# Altium PCB MCU_Board_fNIRS.PcbDoc
Units mm, origin at the board's own origin, x right, y up, seen from the top; angles counter-clockwise.
Board outline 42 x 42 mm, 4 copper layers (SIG_TOP, GND_TOP, GND_BOT, SIG_BOT), stack 1.658 mm thick; 53 components, 60 nets, 275 pads, 63 vias.
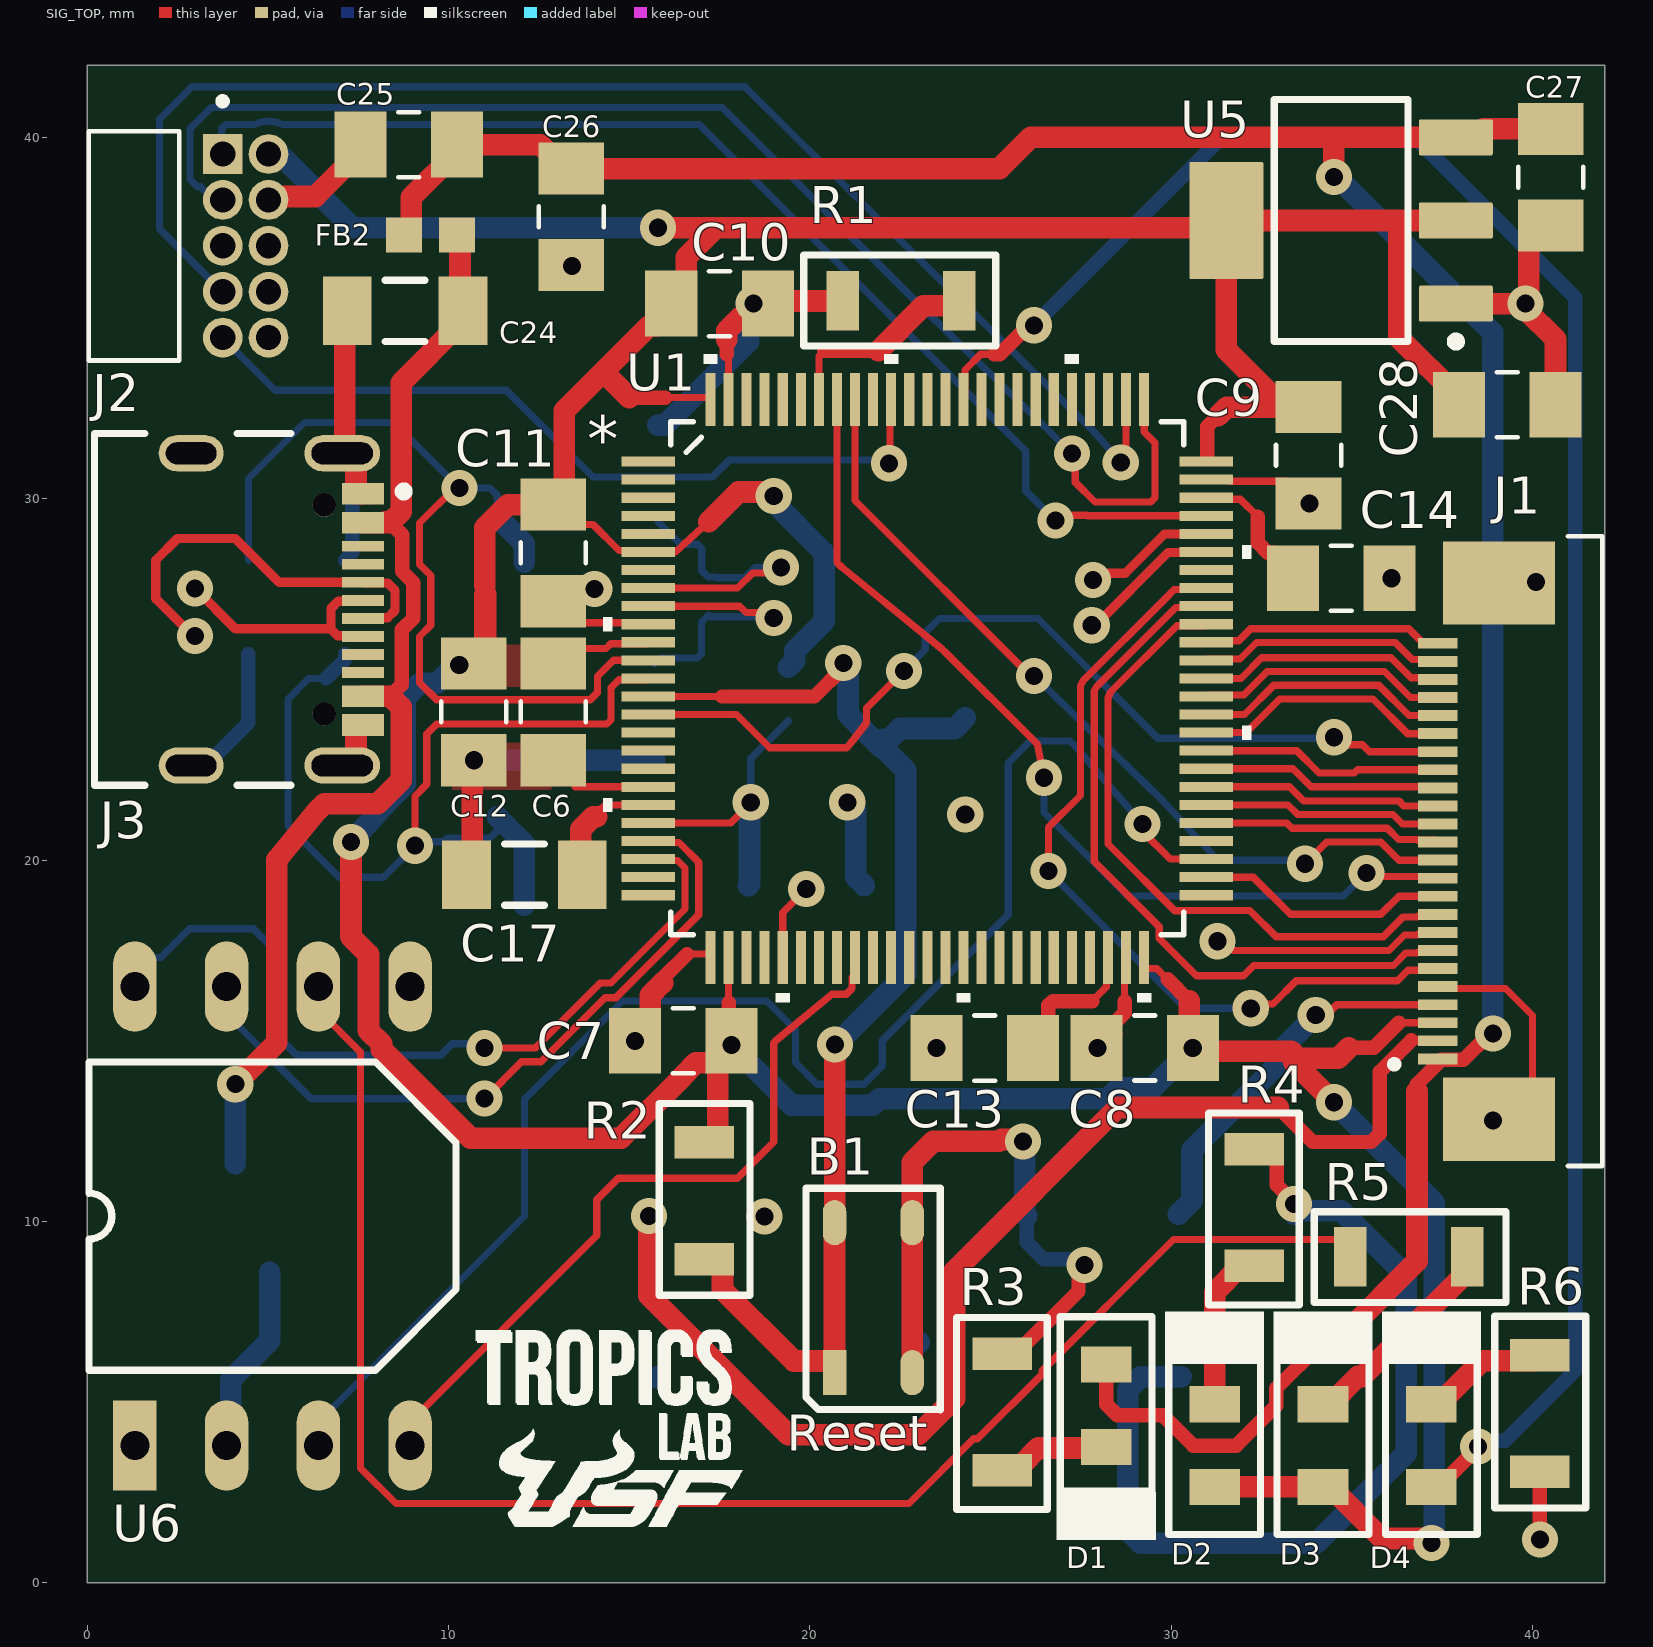
[diagram p0: SIG_TOP view]
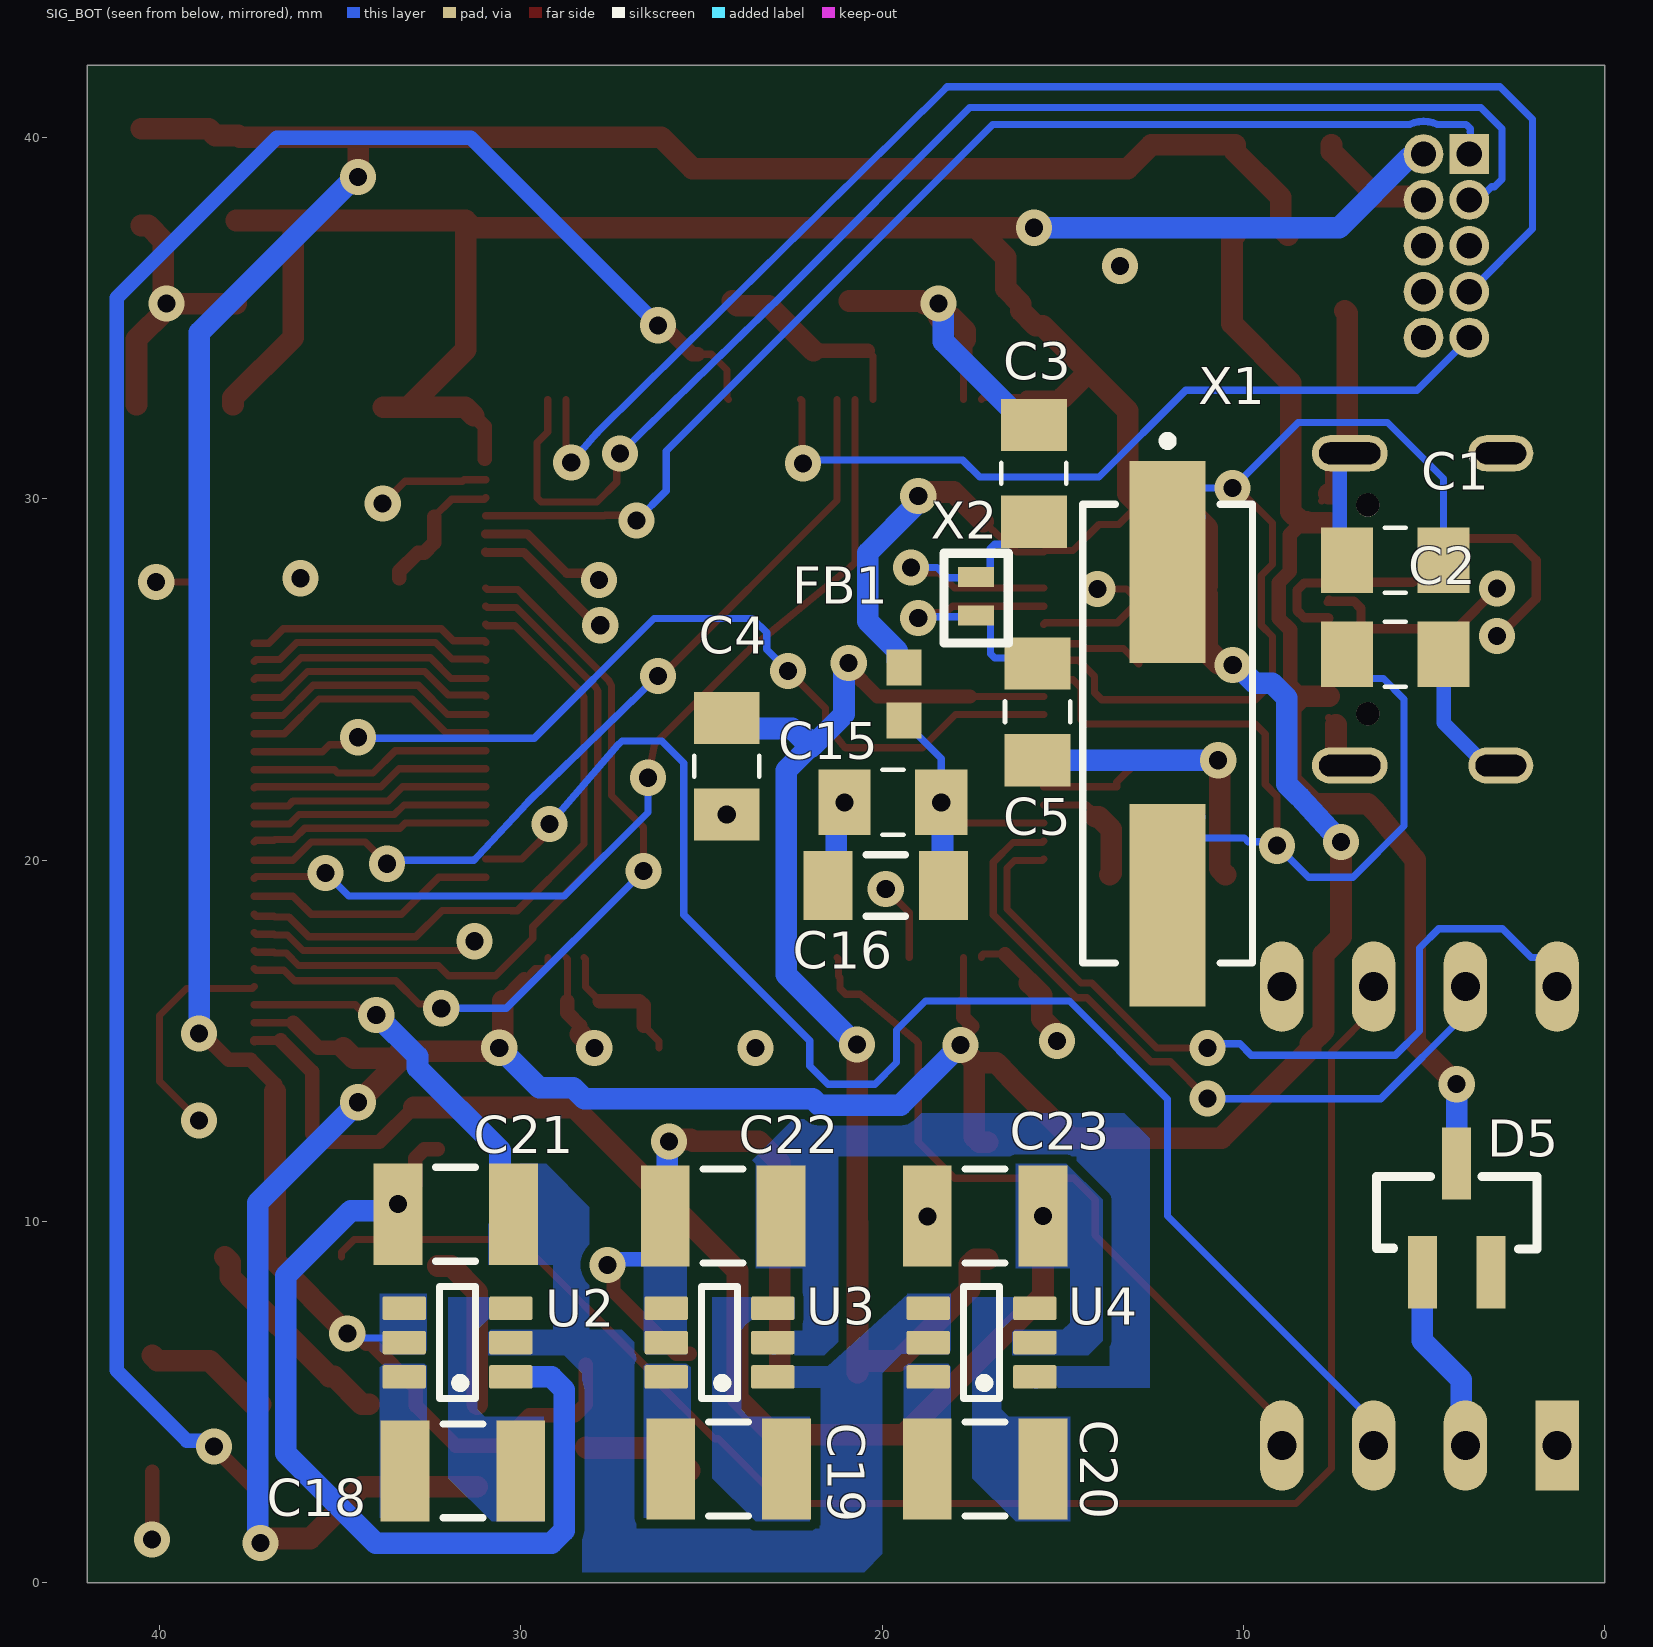
[diagram p1: SIG_BOT view, seen from below]
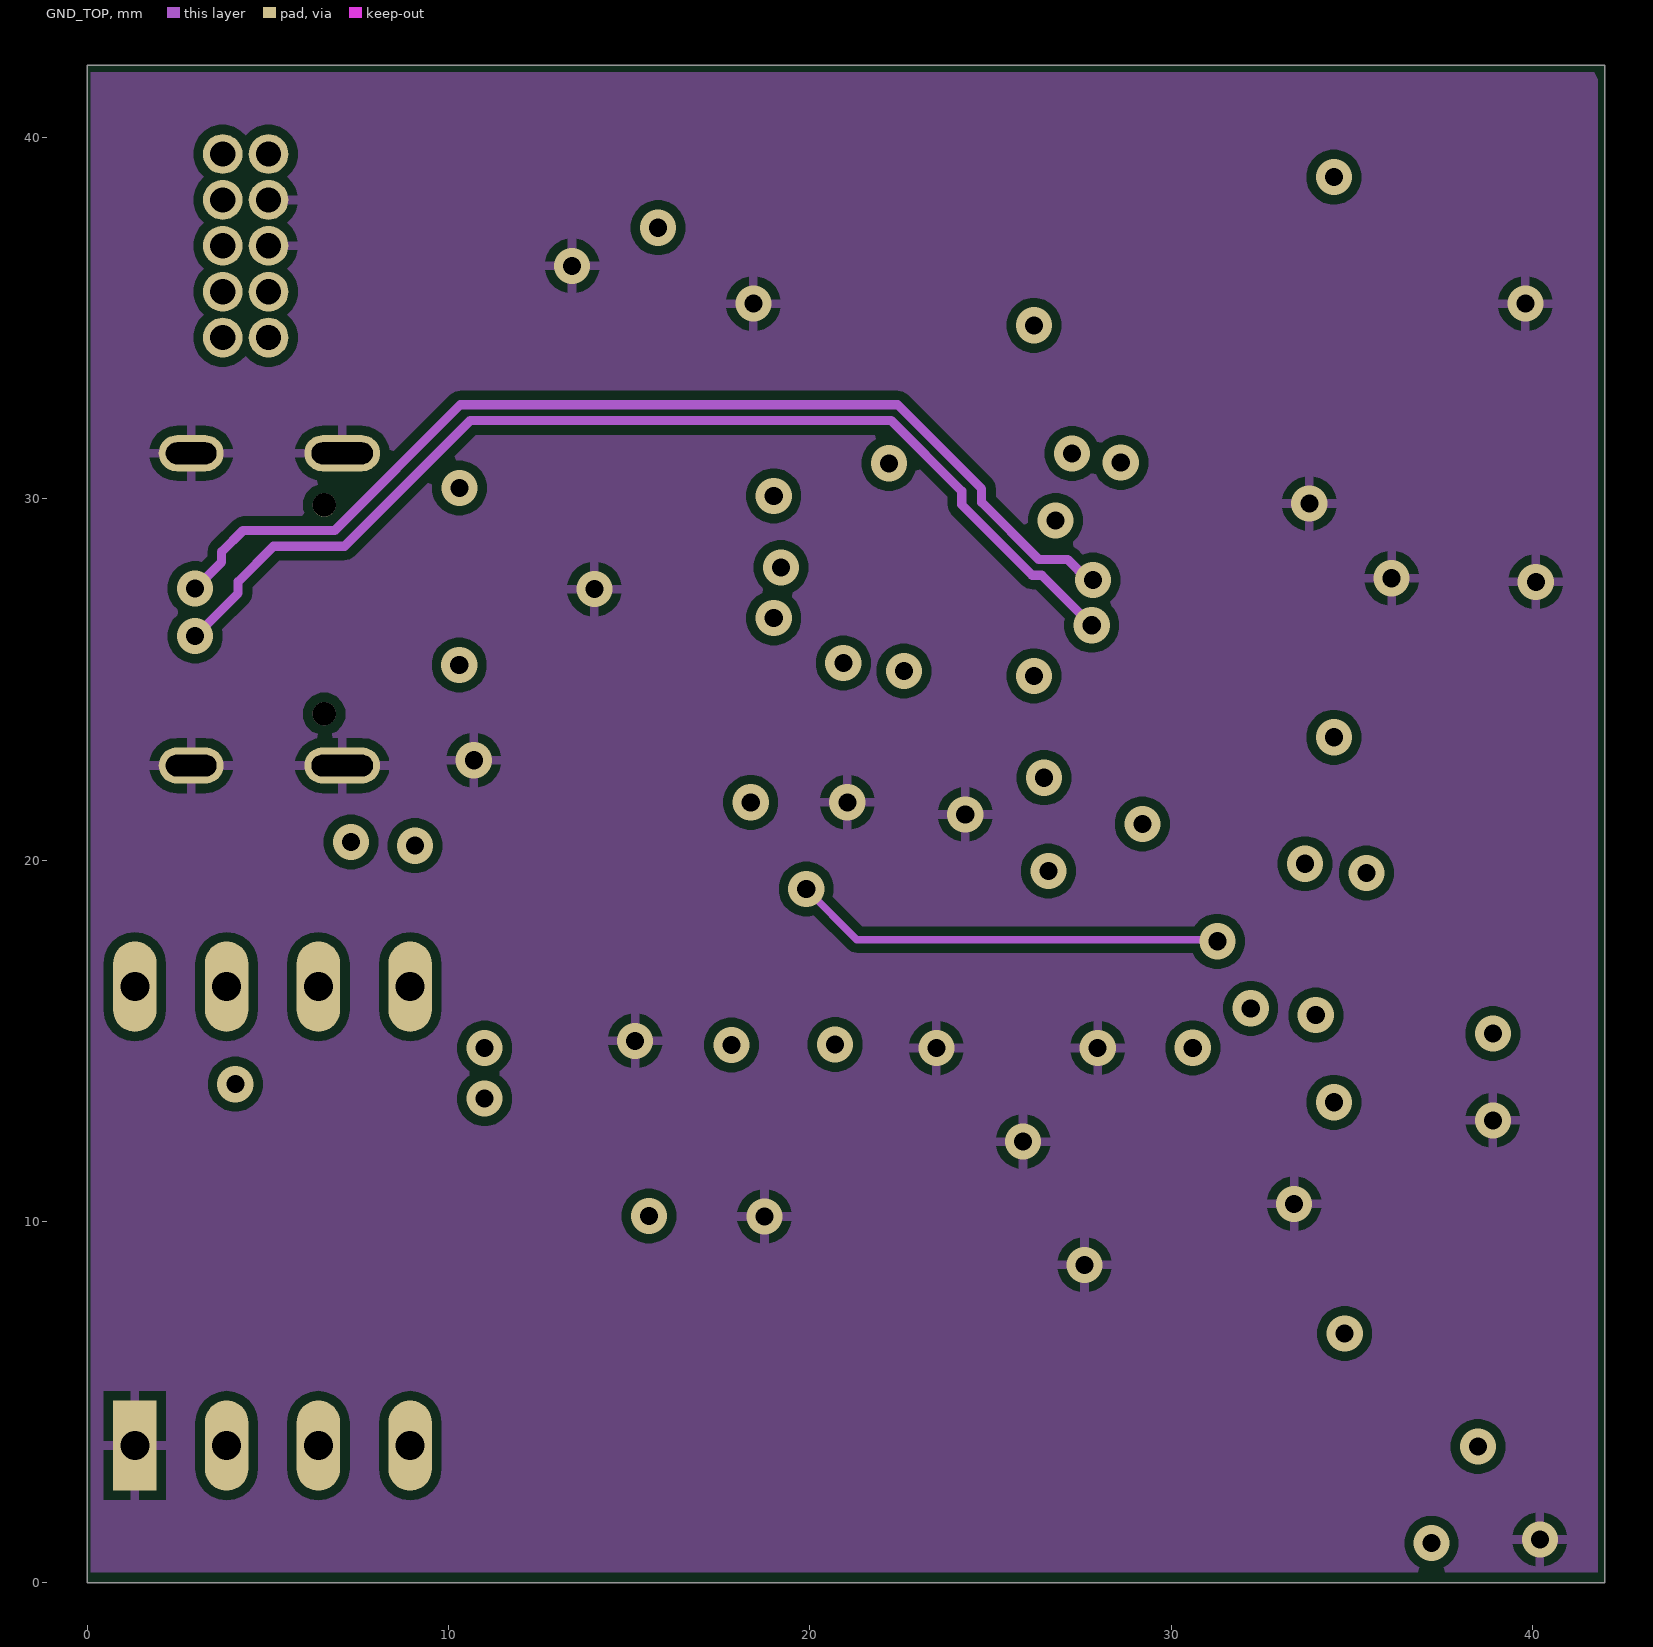
[diagram p2: GND_TOP]
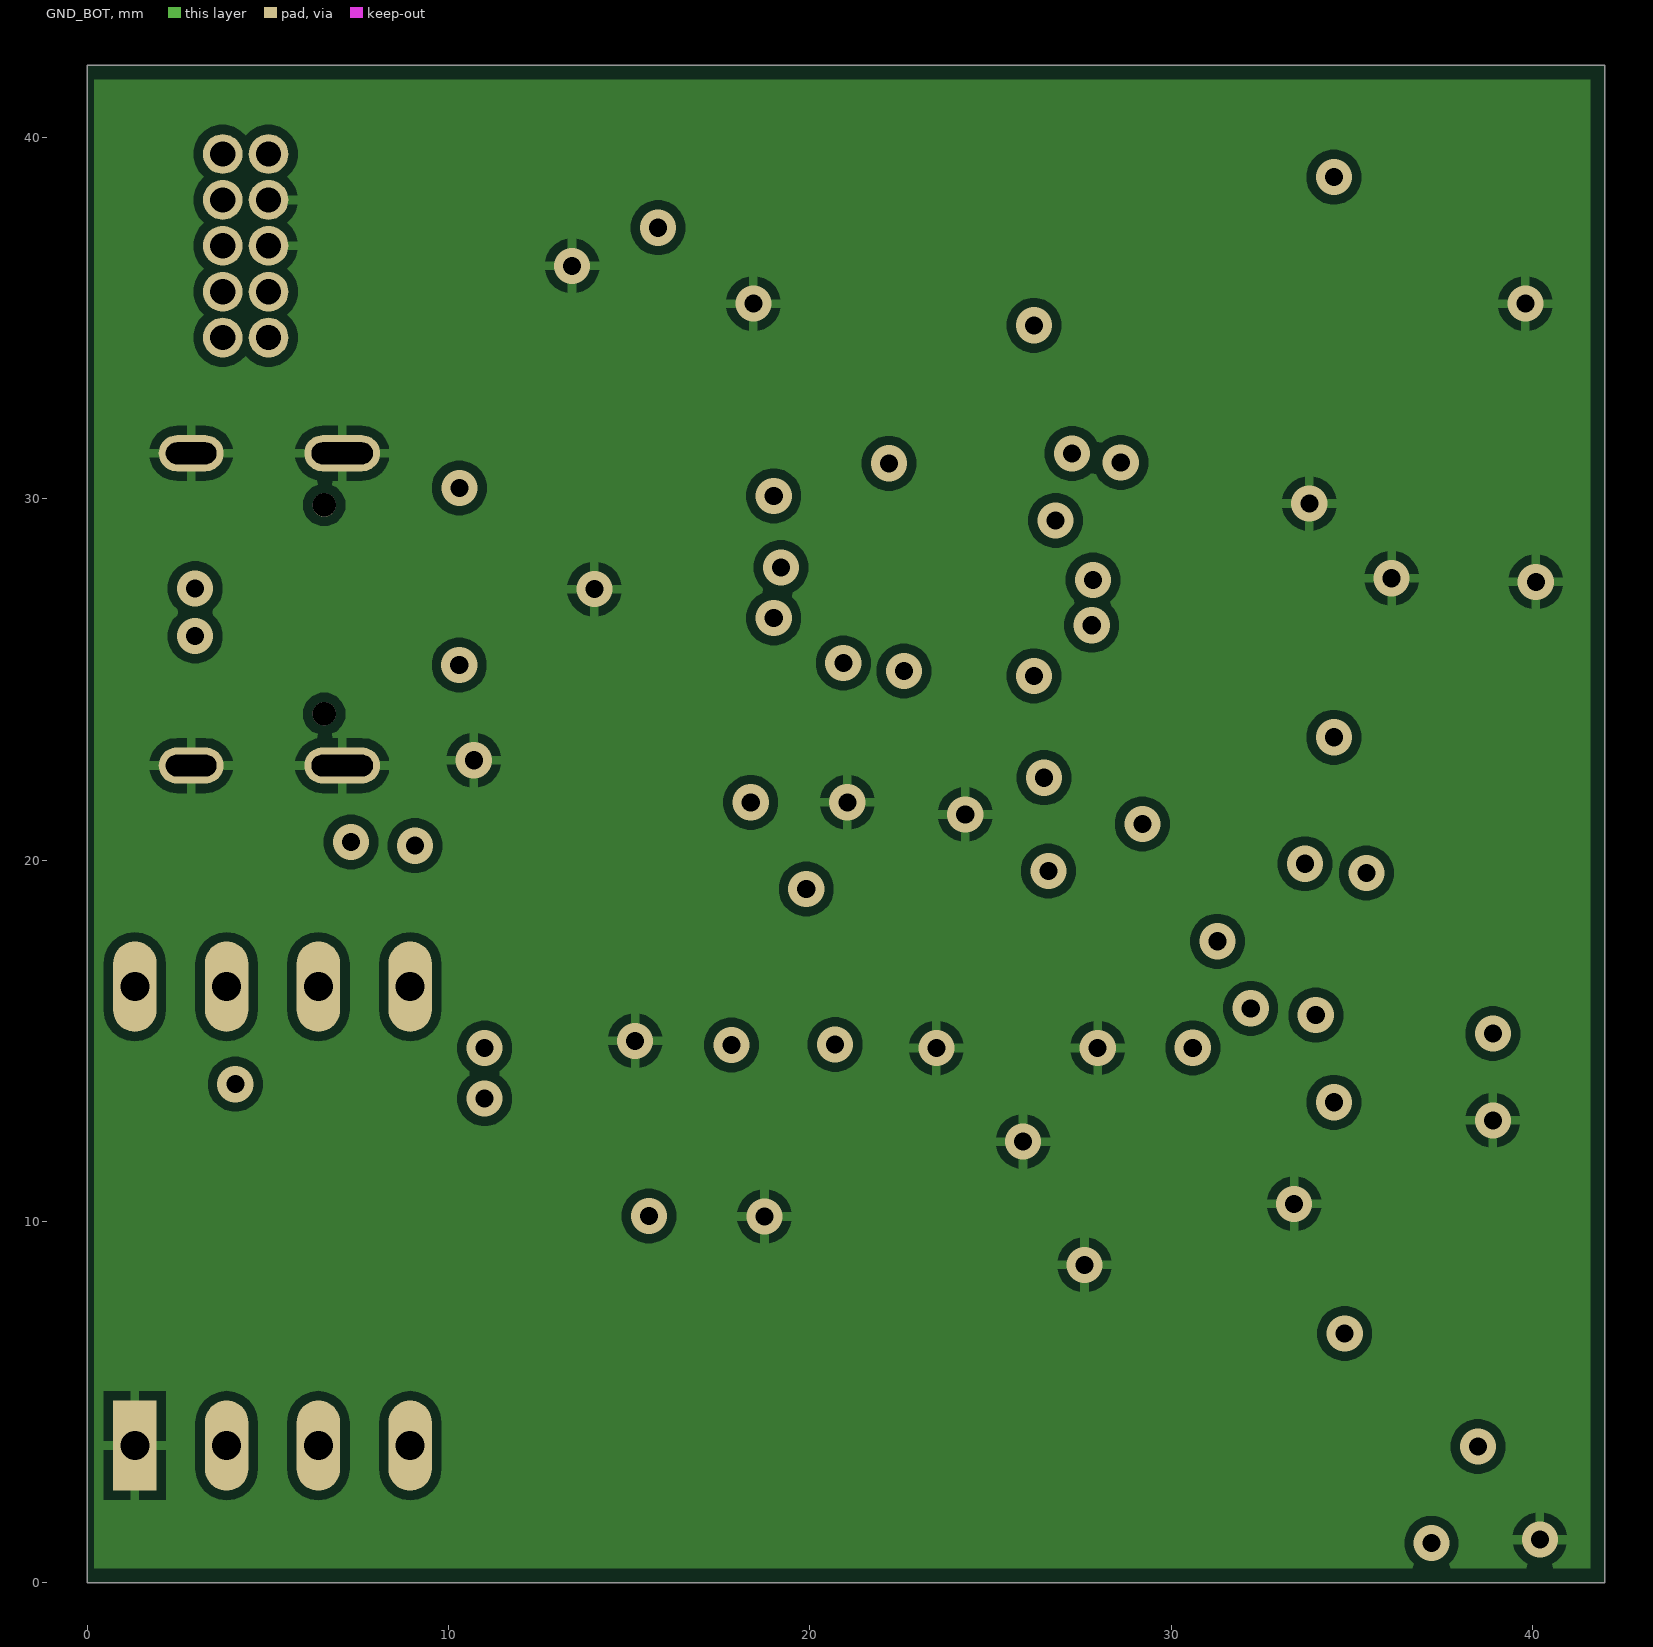
[diagram p3: GND_BOT]
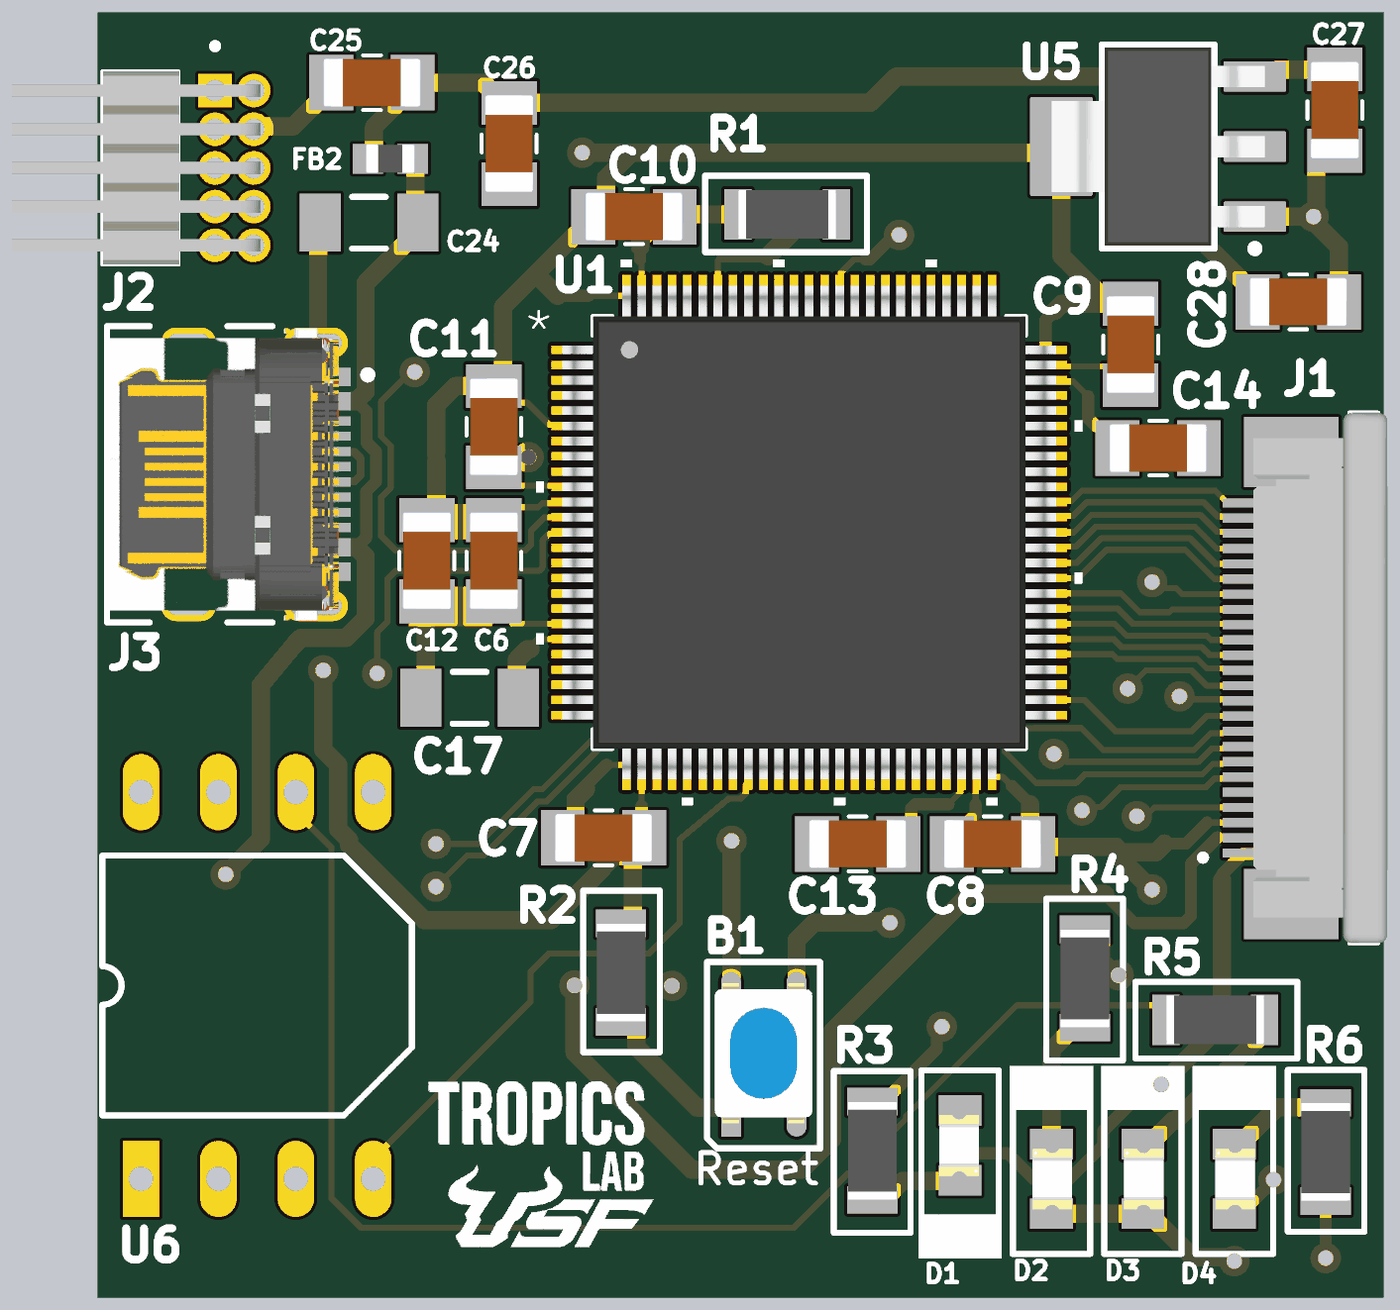
[diagram p4: 3D render of the assembled board from above, using the file's embedded part models]
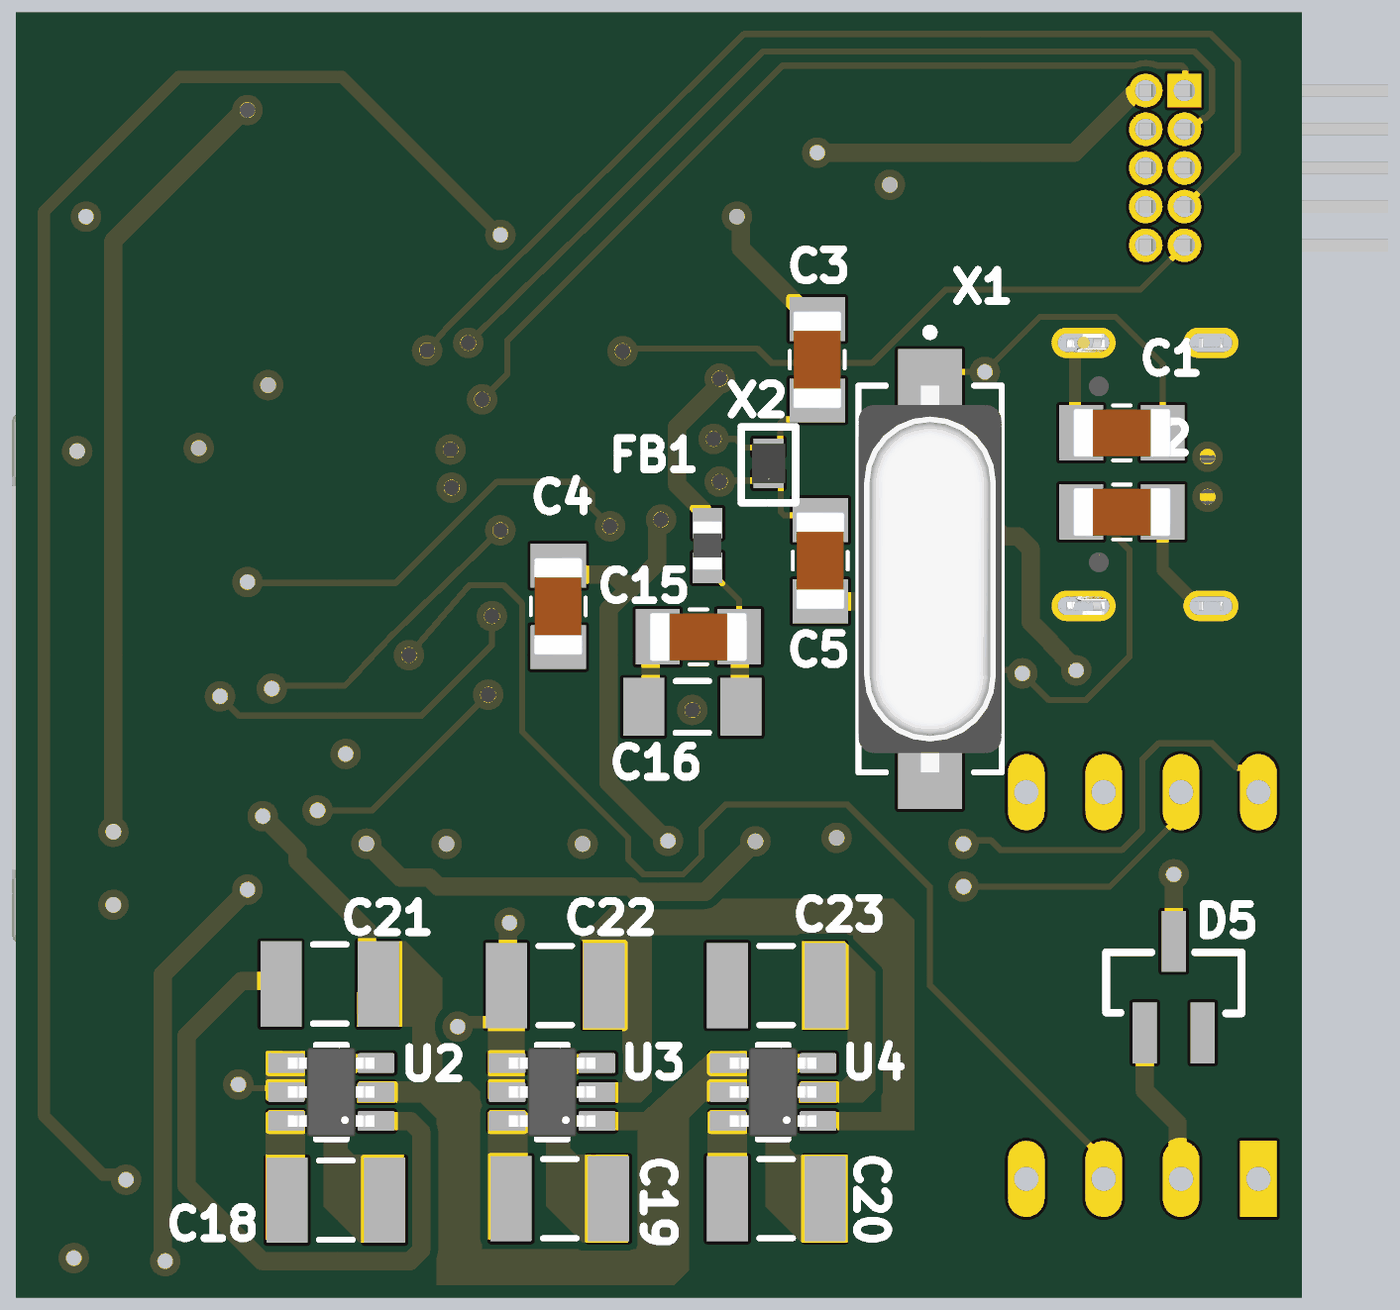
[diagram p5: 3D render of the assembled board from below, using the file's embedded part models]

## Layer stack, top to bottom
Top Solder: solder mask 0.0102, Solder Resist, Dk 3.5
SIG_TOP: signal copper 0.035
Dielectric 2: prepreg 0.2104, PP-006, Dk 4.1
GND_TOP: signal copper 0.051
Dielectric 1: dielectric 1.065, FR-4, Dk 4.8
GND_BOT: signal copper 0.051
Dielectric 3: prepreg 0.2104, PP-006, Dk 4.1
SIG_BOT: signal copper 0.035
Bottom Solder: solder mask 0.0102, Solder Resist, Dk 3.5

## Board outline
0,0 0,42 42,42 42,0

## Design rules (kind name [scope] priority, off if disabled: settings)
Clearance [All] p1: gap=0.254 ignorepadtopadclearanceinfootprint=TRUE except(0: Arc-Hole Track-Hole SMDPad-Hole THPad-Hole Via-Hole Fill-Hole Poly-Hole Region-Hole Text-Hole; 0.18: Arc-Arc Arc-Track Arc-SMDPad Track-Track Track-SMDPad)
DiffPairsRouting [InDifferentialPair('USB_OTG_D')] p1 off: maxlimit=0.254 minlimit=0.127 mostfreqgap=0.254 toplayer_maxgap=0.127 toplayer_prefgap=0.127 toplayer_minwidth=0.261 toplayer_maxwidth=0.261 toplayer_prefwidth=0.261 midlayer1_mingap=0.254 midlayer1_minwidth=0.381 midlayer1_maxwidth=0.381 midlayer1_prefwidth=0.381 midlayer2_mingap=0.254 midlayer2_minwidth=0.381 midlayer2_maxwidth=0.381 midlayer2_prefwidth=0.381 bottomlayer_maxgap=0.127 bottomlayer_prefgap=0.127 bottomlayer_minwidth=0.261 bottomlayer_maxwidth=0.261 bottomlayer_prefwidth=0.261 maxuncoupledlength=12.7
PolygonConnect [All] p1: thpad.connectstyle=Relief thpad.reliefconductorwidth=0.254 thpad.reliefentries=4 thpad.polygonreliefangle="90 Angle" thpad.airgapwidth=0.254 smdpad.connectstyle=Direct smdpad.reliefconductorwidth=0.254 smdpad.reliefentries=4 smdpad.polygonreliefangle="90 Angle" smdpad.airgapwidth=0.254 via.connectstyle=Relief via.reliefconductorwidth=0.254 via.reliefentries=4 via.polygonreliefangle="90 Angle" via.airgapwidth=0.254
RoutingVias RoutingVias_1 [All] p1: holewidth=0.5 width=1 viastyle="Through Hole" minholewidth=0.5 minwidth=1 maxholewidth=0.5 maxwidth=1
SilkToSilkClearance [All] p1 off: silktosilkclearance=0.254
SilkToSolderMaskClearance [IsPad] p1 off: minsilkscreentomaskgap=0.254 clearancetoexposedcopper=TRUE
SolderMaskExpansion [All] p1: expansion=0.102 istentingtop=FALSE
Width [All] p1: maxlimit=0.6 minlimit=0.2 preferedwidth=0.4 minimp=50.000000 maximp=50.000000 favimp=50.000000
27 further rules are at their usual default settings.

## Classes and differential pairs
component class MCU_Board_fNIRS: B1 C1 C2 C3 C4 C5 C6 C7 C8 C9 C10 C11 C12 C13 C14 C15 C16 C17 D5 FB1 J1 J2 R1 R2 U1 U6 X1 X2
component class MCU_Board_fNIRS_POWER: C18 C19 C20 C21 C22 C23 C24 C25 C26 C27 C28 D1 D2 D3 D4 FB2 J3 R3 R4 R5 R6 U2 U3 U4 U5
differential pair USB_OTG_D: +USB_OTG_D_P -USB_OTG_D_N

## Components (designator, comment, footprint, x,y, rotation, side; value= is the part's Value field where it differs from the comment)
B1 "Push Button" PTS810 21.7,7.9 r90 top
C1 "27pF" CAPC3216X180N 5.8,28.3 r180 bottom value=1uF
C2 "27pF" CAPC3216X180N 5.8,25.7 r0 bottom value=1uF
C3 "18pF" CAPC3216X180N 15.8,30.7 r90 bottom value=1uF
C4 "0.1uF" CAPC3216X180N 24.3,22.6 r90 bottom value="0.10 μF"
C5 "18pF" CAPC3216X180N 15.7,24.1 r270 bottom value=1uF
C6 "0.1uF" CAPC3216X180N 12.9,24.1 r90 top value="0.10 μF"
C7 "0.1uF" CAPC3216X180N 16.5,15 r0 top value="0.10 μF"
C8 "0.1uF" CAPC3216X180N 29.265,14.801 r0 top value="0.10 μF"
C9 "0.1uF" CAPC3216X180N 33.8,31.2 r90 top value="0.10 μF"
C10 "0.1uF" CAPC3216X180N 17.5,35.4 r180 top value="0.10 μF"
C11 "0.1uF" CAPC3216X180N 12.9,28.5 r90 top value="0.10 μF"
C12 "47uF" CAPC3216X180N 10.7,24.1 r90 top value=1uF
C13 "0.1uF" CAPC3216X180N 24.836,14.8 r0 top value="0.10 μF"
C14 "0.1uF" CAPC3216X180N 34.7,27.8 r180 top value="0.10 μF"
C15 "0.1uF" CAPC3216X180N 19.7,21.6 r180 bottom value="0.10 μF"
C16 "1uF" CAPC1206(3216)130_M 19.9,19.3 r180 bottom
C17 "1uF" CAPC1206(3216)130_M 12.1,19.6 r0 top
C18 "3.3uF" CAPC1210(3225)190_M 31.6,3.1 r180 bottom
C19 "3.3uF" CAPC1210(3225)190_M 24.25,3.15 r180 bottom
C20 "3.3uF" CAPC1210(3225)190_M 17.15,3.15 r180 bottom
C21 "3.3uF" CAPC1210(3225)190_M 31.8,10.2 r0 bottom
C22 "3.3uF" CAPC1210(3225)190_M 24.4,10.15 r0 bottom
C23 "3.3uF" CAPC1210(3225)190_M 17.15,10.15 r0 bottom
C24 "10nF" CAPC1206(3216)130_M 8.8,35.2 r180 top value=1uF
C25 "0.1uF" CAPC3216X180N 8.9,39.8 r180 top value="0.10 μF"
C26 "10uF" CAPC3216X180N 13.4,37.8 r270 top
C27 "1uF" CAPC3216X180N 40.5,38.9 r90 top
C28 "1uF" CAPC3216X180N 39.3,32.6 r180 top
D1 "BLUE LED" XZCFBB54W-1VF 28.2,4.9 r90 top
D2 "BLUE LED" XZCFBB54W-1VF 31.2,3.8 r270 top
D3 "GREEN LED" XZCFBB54W-1VF 34.2,3.8 r270 top
D4 "GREEN LED" XZCFBB54W-1VF 37.2,3.8 r270 top
D5 "BAT54LT1G" BAT54LT1 4.1,10.1 r180 bottom (schematic designator D?)
FB1 "600 Ohms @ 100 MHz" BEADC1608X95N 19.4,24.6 r270 bottom value=1uF
FB2 "BLM18PG221SN1D" BEADC1608X95N 9.5,37.3 r180 top value=1uF
J1 "FPC Connector" TE_FPC 37.372,20.25 r90 top
J2 "20021112-00010T4LF" AMPHENOL_20021112-00010T4LF 1.3,37 r270 top
J3 "USB4105-GF-A" FP-USB4105-GF-A-MFG 4.045,26.938 r270 top
R1 "10k" R1206 22.5,35.5 r180 top
R2 "10k" R1206 17.1,10.6 r90 top
R3 "300" R1206 25.3,4.7 r270 top
R4 "300" R1206 32.275,10.36 r270 top
R5 "300" R1206 36.6,9 r0 top
R6 "300" R1206 40.225,4.71 r90 top
U1 "STM32H723VGT6" LQFP100_STM 23.25,25.028 r0 top
U2 "LM2664" LM2664 31.75,6.65 r0 bottom
U3 "LM2664" LM2664 24.5,6.65 r0 bottom
U4 "LM2664" LM2664 17.25,6.65 r0 bottom
U5 "TLV1117LV33DCYR" DCY0004A_M 34.7,37.7 r180 top
U6 "FTDI UART" UB232R 1.32,3.8 r90 top
X1 "ABLS-8.000MHZ-B4-T" ABRA-ABLS-14.7456MHZ-B2-T_V 12.1,23.5 r270 bottom
X2 "ECS-.327-6-1210-TR" ECS-.327-6-1210-TR 17.4,27.3 r90 bottom

## Footprints (in the part's own frame and the unit in brackets; to place one, negate y for a bottom-side part, rotate by r counter-clockwise, add the part's x,y. Pads: shape width x height; smd on the part's side, far side on the other; paste and mask are expansions set on the pad)
ABRA-ABLS-14.7456MHZ-B2-T_V [mm] "SMD, 2-Leads, Body 11.4x4.7mm"
  rect 5.6x2.1 smd: 1(-4.75,0) 2(4.75,0)
  silkscreen extent -8.22,-2.35 6.35,2.35, body extent -6.35,-2.35 6.35,2.35, height 4.16
AMPHENOL_20021112-00010T4LF [mm]
  rect 1.1x1.1 / inner round 1.1 / far side rect 1.1x1.1 hole 0.7: 1(-2.54,2.45)
  round 1.1 hole 0.7: 2(-2.54,3.72) 3(-1.27,2.45) 4(-1.27,3.72) 5(0,2.45) 6(0,3.72) 7(1.27,2.45) 8(1.27,3.72) 9(2.54,2.45) 10(2.54,3.72)
  silkscreen extent -4.1,-1.25 3.18,2.55, body extent -3.18,-4.23 3.18,3.94, height 3.43
BAT54LT1 [mm]
  rect 0.8x2 smd: 1(-0.95,-1.503) 2(0.95,-1.503) 3(-0.001,1.503)
  silkscreen extent -2.22,-0.86 2.23,1.14
BEADC1608X95N [mm]
  rect 1x0.97 smd: 1(-0.735,0) 2(0.735,0)
  body extent -0.8,-0.48 0.8,0.47, height 0.8
CAPC1206(3216)130_M [mm] "Chip Capacitor, Body 3.2x1.6mm, Height 1.3mm, IPC Low Density"
  rect 1.35x1.9 smd: 1(-1.6,0) 2(1.6,0)
  silkscreen extent -0.55,-0.85 0.55,0.85, body extent -1.7,-0.9 1.7,0.9, height 1.3
CAPC1210(3225)190_M [mm] "Chip Capacitor, Body 3.2x2.5mm, Height 1.9mm, IPC Low Density"
  rect 1.35x2.8 smd: 1(-1.6,0) 2(1.6,0)
  silkscreen extent -0.55,-1.3 0.55,1.3, body extent -1.7,-1.35 1.7,1.35, height 1.9
CAPC3216X180N [mm]
  rect 1.44x1.82 smd: 1(-1.336,0) 2(1.336,0)
  silkscreen extent -0.29,-0.9 0.29,0.9, body extent -1.6,-0.8 1.6,0.8, height 1.8
DCY0004A_M [mm] "SOT223, 4-Leads, Body 6.7x3.7mm, Pitch 2.3mm, IPC Low Density"
  rrect10% 2.05x1 smd: 1(-3.175,2.3) 2(-3.175,0) 3(-3.175,-2.3)
  rrect5% 2.05x3.25 smd: 4(3.175,0)
  silkscreen extent -3.3,-3.35 1.85,3.47, body extent -3.5,-3.25 3.5,3.25, height 1.62
ECS-.327-6-1210-TR [mm]
  rect 0.55x1 smd: 1(-0.533,0) 2(0.533,0)
  silkscreen extent -1.3,-0.89 1.19,0.89, body extent -0.65,-0.55 0.65,0.55, height 0.51
FP-USB4105-GF-A-MFG [mm]
  rrect100% 1x2.1 hole 1.7 slot 0.6 at 0 deg paste-1000 mask+0: 1(-4.32,3.015) 2(4.32,3.015)
  rrect100% 1x1.8 hole 1.4 slot 0.6 at 0 deg paste-1000 mask+0: 3(-4.32,-1.165) 4(4.32,-1.165)
  rect 0.6x1.15 smd paste+0 mask+0: A1-B12(-3.2,3.59) A4-B9(-2.4,3.59) B1-A12(3.2,3.59) B4-A9(2.4,3.59)
  rect 0.3x1.15 smd paste+0 mask+0: A5(-1.25,3.59) A6(-0.25,3.59) A7(0.25,3.59) A8(1.25,3.59) B5(1.75,3.59) B6(0.75,3.59) B7(-0.75,3.59) B8(-1.75,3.59)
  round 0.65 hole 0.65 unplated paste-1000 mask+0: ""(-2.89,2.515) ""(2.89,2.515)
  silkscreen extent -4.86,-3.84 4.86,4.84, body extent -4.96,-3.94 4.96,4.27, height 0.25
LM2664 [mm] "SOT23, 6-Leads, Body 3.05x1.75mm, Pitch 0.95mm, IPC Low Density"
  rrect15% 1.2x0.65 smd: 1(-1.475,0.95) 2(-1.475,0) 3(-1.475,-0.95) 4(1.475,-0.95) 5(1.475,0) 6(1.475,0.95)
  silkscreen extent -0.5,-1.55 0.5,1.55, body extent -1.42,-1.46 1.42,1.46, height 1.11
LQFP100_STM [mil]
  rect 58x11 smd paste-29 mask+5: 1(-304,236.22) 2(-304,216.54) 3(-304,196.85) 4(-304,177.17) 5(-304,157.48) 6(-304,137.8) 7(-304,118.11) 8(-304,98.43) 9(-304,78.74) 10(-304,59.06) 11(-304,39.37) 12(-304,19.69) 13(-304,0) 14(-304,-19.68) 15(-304,-39.37) 16(-304,-59.06) 17(-304,-78.74) 18(-304,-98.43) 19(-304,-118.11) 20(-304,-137.8) 21(-304,-157.48) 22(-304,-177.17) 23(-304,-196.85) 24(-304,-216.54) 25(-304,-236.22) 51(304,-236.22) 52(304,-216.54) 53(304,-196.85) 54(304,-177.17) 55(304,-157.48) 56(304,-137.8) 57(304,-118.11) 58(304,-98.43) 59(304,-78.74) 60(304,-59.06) 61(304,-39.37) 62(304,-19.68) 63(304,0) 64(304,19.68) 65(304,39.37) 66(304,59.06) 67(304,78.74) 68(304,98.43) 69(304,118.11) 70(304,137.8) 71(304,157.48) 72(304,177.17) 73(304,196.85) 74(304,216.54) 75(304,236.22)
  rect 11x58 smd paste-29 mask+5: 26(-236.22,-304) 27(-216.54,-304) 28(-196.85,-304) 29(-177.17,-304) 30(-157.48,-304) 31(-137.8,-304) 32(-118.11,-304) 33(-98.43,-304) 34(-78.74,-304) 35(-59.06,-304) 36(-39.37,-304) 37(-19.69,-304) 38(0,-304) 39(19.68,-304) 40(39.37,-304) 41(59.06,-304) 42(78.74,-304) 43(98.43,-304) 44(118.11,-304) 45(137.8,-304) 46(157.48,-304) 47(177.17,-304) 48(196.85,-304) 49(216.54,-304) 50(236.22,-304) 76(236.22,304) 77(216.54,304) 78(196.85,304) 79(177.17,304) 80(157.48,304) 81(137.8,304) 82(118.11,304) 83(98.43,304) 84(78.74,304) 85(59.06,304) 86(39.37,304) 87(19.68,304) 88(0,304) 89(-19.69,304) 90(-39.37,304) 91(-59.06,304) 92(-78.74,304) 93(-98.43,304) 94(-118.11,304) 95(-137.8,304) 96(-157.48,304) 97(-177.17,304) 98(-196.85,304) 99(-216.54,304) 100(-236.22,304)
  silkscreen extent -353,-353 353,353, body extent -319,-319 319,319, height 63
PTS810 [mm]
  rect 1.25x0.65 smd: 1(-2.083,1.016)
  oval 1.25x0.65 smd: 2(2.067,1.016) 3(-2.083,-1.134) 4(2.067,-1.134)
  silkscreen extent -3.11,-1.91 3.02,1.8, body extent -2.27,-1.65 2.33,1.55, height 2.7
R1206 [mm]
  rect 0.9x1.65 smd: 1(-1.64,0.025) 2(1.59,0.025)
  silkscreen extent -2.64,-1.24 2.67,1.27, body extent -1.63,-0.77 1.57,0.83, height 0.6
TE_FPC [mm]
  rect 0.3x1.1 smd: 1(-5.75,0) 2(-5.25,0) 3(-4.75,0) 4(-4.25,0) 5(-3.75,0) 6(-3.25,0) 7(-2.75,0) 8(-2.25,0) 9(-1.75,0) 10(-1.25,0) 11(-0.75,0) 12(-0.25,0) 13(0.25,0) 14(0.75,0) 15(1.25,0) 16(1.75,0) 17(2.25,0) 18(2.75,0) 19(3.25,0) 20(3.75,0) 21(4.25,0) 22(4.75,0) 23(5.25,0) 24(5.75,0)
  rect 2.3x3.1 smd: S1(-7.42,-1.7) S2(7.42,-1.7)
  silkscreen extent -8.71,-4.55 8.71,1.3, body extent -8.71,-4.86 8.71,0.25
UB232R [mm]
  rect 2.5x1.2 hole 0.8: 1(0,0)
  oval 2.5x1.2 hole 0.8: 2(0,-2.54) 3(0,-5.08) 4(0,-7.62) 5(12.7,-7.62) 6(12.7,-5.08) 7(12.7,-2.54) 8(12.7,0)
  silkscreen extent 2.08,-8.89 10.62,1.27
XZCFBB54W-1VF [mm]
  rect 1x1.4 smd: 1(-1.143,0) 2(1.143,0)
  silkscreen extent -3.71,-1.37 2.47,1.37, body extent -1,-0.62 1,0.68, height 0.9

## Part data
B1: library part "PTS810 SJG 250 SMTR LFS", "Tactile Switch SPST-NO Top Actuated Surface Mount"
C1 C2: library part C1206C270K5GAC7800, "CAP CER 27PF 50V C0G/NP0 1206", Case-EIA=1206, Case-Metric=3216, Rated Voltage="25 V", Tolerance="-20% to +80%", Max Thickness="1.3 mm", Technology=SMT
C3 C5: library part C1206C180J5GAC7800, "18 pF ±5% 50V Ceramic Capacitor C0G, NP0 1206 (3216 Metric)", Case-EIA=1206, Case-Metric=3216, Rated Voltage="25 V", Tolerance="-20% to +80%", Max Thickness="1.3 mm", Technology=SMT
C4 C6 C7 C8 C9 C10 C11 C13 C14 C15 C25: library part C1206C104K5RAC7210, "1206", Capacitance="0.10 μF", Manufacturer=KEMET, Package=C1206C-EB, Temperature="-55°C to +150°C", Temperature Characteristic=X7R, Temperature Coefficient=15%, Temperature Range High=+150°C, Temperature Range Low=-55°C, Tolerance=0.1, Voltage Rating="50 V", Automotive=Yes, Automotive Grade="Grade 0", Category=Cap, ComponentLink2Description=Datasheet, ComponentLink2URL=https://content.kemet.com/datasheets/KEM_C1007_X8R_ULTRA_150C_SMD.pdf, Device Class L1="Passive Components", Device Class L2=Capacitors, Device Class L3="Ceramic Capacitors", Digikey Description="CAP CER 0.1UF 50V X7R 1206", Height=0.88mm, Ipc Land Pattern Name=CAPC320160X78, Lead Free=Yes, Manufacturer Part Number=C1206C104K5RAC7210, Material=Ceramic, Mouser Description="Multilayer Ceramic Capacitors MLCC - SMD/SMT 50volts 0.1uF X7R 10%", Octopart=https://octopart.com/c1206c104k5rac7210-kemet-3919856, RoHS=TRUE
C12: library part CL31A476MQHNNWE, "47 µF ±20% 6.3V Ceramic Capacitor X5R 1206 (3216 Metric)", Case-EIA=1206, Case-Metric=3216, Rated Voltage="25 V", Tolerance="-20% to +80%", Max Thickness="1.3 mm", Technology=SMT
C16: library part 12063G105ZAT4A_1, "CAP 1uF 25V -20% to +80% 1206 (3216 Metric) Thickness 1.3mm SMD / C1206C105Z3VAC7800", Case-EIA=1206, Case-Metric=3216, Rated Voltage="25 V", Tolerance="-20% to +80%", Max Thickness="1.3 mm", Technology=SMT
C17: library part 12063G105ZAT4A_1, "CAP 1uF 25V -20% to +80% 1206 (3216 Metric) Thickness 1.3mm SMD", Case-EIA=1206, Case-Metric=3216, Rated Voltage="25 V", Tolerance="-20% to +80%", Max Thickness="1.3 mm", Technology=SMT
C18 C19 C20 C21 C22 C23: library part C1210C335K5RAC7800, "1210"
C24: library part C1206C103KMREC7800, "10000 pF ±10% 63V Ceramic Capacitor X7R 1206 (3216 Metric)", Case-EIA=1206, Case-Metric=3216, Rated Voltage="25 V", Tolerance="-20% to +80%", Max Thickness="1.3 mm", Technology=SMT
C26: library part CL31B106KOHNNWE, "1206"
C27 C28: library part 12063G105ZAT4A, "CAP 1uF 25V -20% to +80% 1206 (3216 Metric) Thickness 1.3mm", Case-EIA=1206, Case-Metric=3216, Rated Voltage="25 V", Tolerance="-20% to +80%", Max Thickness="1.3 mm", Technology=SMT
D1 D2: library part XZCFBB54W-1VF, "Blue 470nm LED Indication - Discrete 2.65V 0805 (2012 Metric)"
D3 D4: library part XZCDGK54W-1VF, "Green 525nm LED Indication - Discrete 2.65V 0805 (2012 Metric)"
D5: library part BAT54L, "Schottky Barrier Diode, 3-Pin SOT-23, Pb-Free, Tape and Reel", Manufacturer="On Semiconductor", ComponentLink1Description="Manufacturer URL", ComponentLink1URL=http://www.onsemi.com/, ComponentLink2Description=Datasheet, ComponentLink2URL=http://www.onsemi.cn/pub_link/Collateral/BAT54LT1-D.PDF, ComponentLink3Description="Package Specification", ComponentLink3URL=http://www.onsemi.cn/pub_link/Collateral/318-08.PDF, Configuration=Single, DatasheetVersion="Rev. 12", IFSM Max (A)=0.6, Mounting Technology="Surface Mount", PackageDescription="3-Pin Small Outline Transistor, Body 2.92 x 1.3 mm, Pitch 0.95 mm", PackageReference=SOT-23-3-318-08, PackageVersion="Rev. AP, 11/2009", Packing="Tape and Reel", PartNumber=BAT54LT1G, RoHS=TRUE, trr Max (ns)=5
FB1: library part "FCM 1608KF-601T03", "600 Ohms @ 100 MHz 1 Ferrite Bead 0603 (1608 Metric) 350mA 500mOhm", Case-EIA=1206, Case-Metric=3216, Rated Voltage="25 V", Tolerance="-20% to +80%", Max Thickness="1.3 mm", Technology=SMT
FB2: "220 Ohms @ 100 MHz 1 Power Line Ferrite Bead 0603 (1608 Metric) 1.4A 100mOhm", Case-EIA=1206, Case-Metric=3216, Rated Voltage="25 V", Tolerance="-20% to +80%", Max Thickness="1.3 mm", Technology=SMT
J1: library part 2-1734592-4, "24 Position FPC Connector Contacts, Bottom 0.020\" _0.50mm_ Surface Mount, Right Angle", Package=None, Availability=Unavailable, MF="TE Connectivity", MP=2-1734592-4, Price=None, SnapEDA_Link=https://www.snapeda.com/parts/2-1734592-4/TE%20Connectivity/view-part/4788511/?ref=snap
J2: "Connector Header Through Hole, Right Angle 10 position 0.050\" (1.27mm)", Package=None, Availability="In Stock", Check_prices=https://www.snapeda.com/parts/20021112-00010T4LF/Amphenol/view-part/?ref=eda, MF=Amphenol, MP=20021112-00010T4LF, Price=None, Purchase-URL=https://pricing.snapeda.com/search?q=20021112-00010T4LF&ref=eda, SnapEDA_Link=https://www.snapeda.com/parts/20021112-00010T4LF/Amphenol/view-part/?ref=snap
J3: "CONN RCPT USB2.0 TYPEC 5A", Current Rating=5/6.25/1.25/0.25A, Manufacturer=GCT, Package=0, Temperature="-40°C to +85°C", Temperature Range High=+85°C, Temperature Range Low=-40°C, Voltage Rating=20V, Automotive=No, Category=Conn, ComponentLink2Description=Datasheet, ComponentLink2URL=https://gct.co/files/drawings/usb4105.pdf, Conn Orientation="Right Angle", Contact Material=Gold,Nickel, Device Class L1=Connectors, Device Class L2="USB Connectors", Device Class L3=unset, Digikey Description="CONN RCPT USB2.0 TYPEC 5A", Height=3.46mm, Is Female=yes, Lead Free=Yes, Manufacturer Part Number=USB4105-GF-A, Number Of Contacts=16, Octopart=https://octopart.com/usb4105-gf-a-gct-106627878, RoHS=TRUE, Usb Standard="USB 2.0"
R1 R2: library part RC1206FR-0710KL, "1206 10kOhm"
R3 R4 R6: library part CRCW1206300RFKEA, "300 Ohms ±1% 0.25W, 1/4W Chip Resistor 1206 (3216 Metric) Automotive AEC-Q200 Thick Film"
R5: library part CRCW1206300RFKEA, "CRCW1206300RFKEA"
U1: "No Description Available", Mfr_Name=STMicroelectronics, RefDes=RefDes, Type=Type
U2 U3 U4: "Switched Capacitor Voltage Converter, 6-pin SOT-23", Manufacturer="Texas Instruments", PackageTopMarking=S03A*XTT, PowerWise=N, Code_IPC=SOT26A-6, Code_JEDEC=MO-178-AB, ComponentLink1Description="Datasheet URL", ComponentLink1URL=http://www.ti.com/general/docs/lit/getliterature.tsp?genericPartNumber=LM2664&fileType=pdf, CompType="Switch Caps", PackageDescription="Molded SOT-23, .115 x .063 x .040in Body, 6 Lead, .0375in in Pitch", PackageReference=DBV0006A, PinCount=6, RoHS=N
U5: library part CMP-0395-00503-2, "Single Output LDO, 1 A, Fixed 3.3 V Output, 2 to 5.5 V Input, 4-pin SOT-223 (DCY), -40 to 125 degC, Green (RoHS & no Sb/Br)", Manufacturer="Texas Instruments", Accuracy(%)=2, Code_JEDEC=TO-261, ComponentLink1Description="Manufacturer URL", ComponentLink1URL=http://www.ti.com/, ComponentLink2Description=Datasheet, ComponentLink2URL=http://www.ti.com/general/docs/lit/getliterature.tsp?genericPartNumber=TLV1117LV33&fileType=pdf, ComponentLink3Description="Package Specification", ComponentLink3URL=http://www.ti.com/litv/pdf/mpds094a, DatasheetVersion=SBVS160A, Eco-Plan="Green (RoHS & no Sb/Br)", Fixed Output Options(V)=3.3, Iout(Max)(A)=1, Iq(Typ)(mA)=0.05, Mounting Technology="Surface Mount", PackageDescription="4-Pin Plastic Small Outline, Body 3.5 x 6.5 mm, Pitch 2.3 mm", PackageReference=DCY0004A, PackageVersion=4202506/B, PartNumber=TLV1117LV33DCYR, SubFamily="Single Channel LDO", Vdo(Typ)(mV)=1200, Vin(Max)(V)=5.5, Vin(Min)(V)=2, Vout Adj(Max)(V)=3.3, Vout Adj(Min)(V)=3.3
U6: library part UB232R, "FT232R - USB 2.0 to UART (RS232) Bridge Interface Evaluation Board"
X1 X2: "Low Profile Crystal, 8.0 MHz, +/- 30 ppm, -20 to 70 degC, 2-Pin SMD, RoHS, Tape and Reel", Case Height=4.2mm, Case Length=11.4mm, Case Width=4.7mm, Frequency=8MHz, Frequency Stability=50PPM, Load Capacitance=18pF, Manufacturer=ABRACON, Operating Temperature Range=-20Cto+70C, Package / Case=HC-49/US, Package Description="2-Pin Surface Mount Device, Body 11.4 x 4.7 mm", Package Reference=ABLS-14.7456MHZ-B2-T, Tolerance=30PPM, Brand=ABRACON, Datasheet URL=http://www.abracon.com/Resonators/abls.pdf, Datasheet Version=04/2011, Dimensions=4.7mmWx11.4mmLx4.2mmH, ESR=80Ohms, Factory Pack Quantity=1000, Manufacturer URL=http://www.abracon.com/, Mounting Style=SMD/SMT, Mounting Technology=SurfaceMount, Package URL=http://www.abracon.com/Support/PackageDrawing/Resonators/ABLS-2D.pdf, Packaging=Reel, Product Category=Crystals, RoHS=Details, Series=ABLS, Termination Style=SMD/SMT, Type=LowProfileMicroprocessorCrystal

## Via types
v1: diameter 1, hole 0.5, SIG_TOP to SIG_BOT, 63 vias

## Nets (pads, with @x,y where several pads share a name; then routed paths per layer and width w, separated by ;. In a path a pad name is that pad's centre, name@x,y a point inside that pad or via, vN(x,y) a via of type N, cw(c..) or ccw(c..) an arc to the next point about the centre after c; other vN are vias at no path point)
3V3: C6.2 C7.2 C8.2 C9.2 C10.2 C11.2 C12.2 C28.2 D2.2 D3.2 FB1.1 J1.3 J2.2 R2.2 U1.6 U1.11 U1.27 U1.50 U1.75 U1.100 U5.2 U5.4 | length 162.1
  SIG_TOP w0.2: C6.2 13.32,25.856 14.359,25.856 14.492,25.989 15.489,25.989 U1.11 ; C11.2 13.444,29.292 13.993,29.292 14.716,28.568 15.489,28.568 U1.6 16.277,28.528 16.366,28.609 16.381,28.609 16.519,28.746 17.2,29.361 ; 16,32.8 17.21,32.8 17.25,32.76 U1.100 ; 17.75,16.05 U1.27 ; U1.50 29.25,17.04 29.29,17 29.6,17 29.9,16.7 ; U1.75 U1.75@31,31.057 ; 36.3,15.505 36.305,15.5 J1.3
  SIG_TOP w0.4: 15,32.8 16,32.8 ; 17.75,16.05 17.75,15.65 17.5,15.4 C7.2@17.836,15.064 ; 29.9,16.7 30.5,16.1 ; U1.75@31,31.1 31,32 31.3,32.3 ; 34.911,14.811 35.606,14.811 36.3,15.505
  SIG_TOP w0.6: v1(7.3,20.5) 7.3,17.882 7.786,17.396 7.786,15.284 8.148,14.922 8.148,14.761 10.609,12.3 14.773,12.3 16.465,13.992 16.465,14.008 16.848,14.39 17.416,14.39 C7.2@17.455,14.429 ; v1(10.298,25.4) v1(10.298,25.4) 10.373,25.473 10.624,25.473 11.008,25.856 11.008,27.356 11.025,27.374 11.025,26.164 11.025,25.761 C12.2 ; 11,27.6 11,29.2 11.636,29.836 C11.2 13.2,30.136 13.2,32.436 14.282,33.518 ; 15,32.8 14.282,33.518 ; v1(15.8,37.5) 17.4,37.5 ; R2.2 17.305,12.19 17.455,12.34 C7.2@17.455,14.429 ; 17.2,29.361 18.027,30.188 18.893,30.188 v1(19,30.08) ; C7.2@17.836,14.81 C7.2@17.455,14.429 ; 30.5,16.1 30.5,14.902 C8.2 ; v1(30.596,14.807) C8.2 ; D2.2 D3.2 34.4,2.657 35.829,1.228 37.072,1.228 v1(37.2,1.1) ; 31.3,32.3 31.536,32.536 C9.2@33.11,32.536 ; 33.393,14.407 v1(34.5,13.3) ; C9.2 C9.2@33.11,32.536 ; 34.911,14.811 34.622,14.522 33.508,14.522 33.319,14.711 30.691,14.711 C8.2 ; U5.2 36.3,37.7 ; C28.2 37.964,32.79 36.3,34.454 36.3,37.7 ; 14.282,33.518 15.554,34.79 15.744,34.79 16.164,35.21 C10.2 16.583,35.819 16.583,36.683 17.4,37.5 ; 17.4,37.5 31.325,37.5 U5.4 ; U5.4 31.525,34.121 C9.2@33.11,32.536 ; U5.4 36.3,37.7
  SIG_BOT w0.6: J2.2 5.116,39.444 5.407,39.444 7.351,37.5 v1(15.8,37.5) ; v1(7.3,20.5) 8.452,21.752 8.8,22.1 8.8,24.493 9.206,24.899 9.689,24.899 10.189,25.4 v1(10.298,25.4) ; v1(17.829,14.884) 19.494,13.22 21.74,13.22 21.92,13.4 28.245,13.4 28.545,13.7 29.489,13.7 v1(30.596,14.807) ; v1(19,30.08) 19,29.899 20.4,28.499 20.4,26.609 19.585,25.794 19.585,25.52 FB1.1 ; v1(34.5,13.3) 37.28,10.52 37.28,1.18 v1(37.2,1.1)
735-S1: J1.6 U1.68 | length 22.9
  SIG_TOP w0.2: v1(26.6,19.7) 26.6,20.9 27.489,21.789 27.489,24.832 27.561,24.965 29.845,27.249 30.085,27.489 30.932,27.489 U1.68 ; v1(32.2,15.9) 32.316,16.016 32.816,16.016 33.462,16.662 36.262,16.662 36.55,16.95 37.322,16.95 J1.6
  SIG_BOT w0.2: v1(26.6,19.7) 30.4,15.9 v1(32.2,15.9)
735-S2: J1.24 U1.65 | length 6.7
  SIG_TOP w0.2: U1.65 31.011,26.068 31.868,26.068 32.2,26.4 36.572,26.4 36.972,26 J1.24
735-S3: J1.22 U1.63 | length 6.9
  SIG_TOP w0.2: U1.63 31.928,25.028 32.5,25.6 36.083,25.6 36.633,25.05 37.322,25.05 J1.22
735-S4: J1.20 U1.61 | length 7.1
  SIG_TOP w0.2: U1.61 32.028,24.028 32.84,24.84 35.743,24.84 36.583,24 J1.20
850-S1: J1.7 U1.67 | length 20.1
  SIG_TOP w0.2: U1.67 30.932,26.989 30.122,26.989 30.002,26.869 27.941,24.808 27.901,24.749 27.869,24.675 27.869,19.96 29.67,18.159 29.67,17.83 30.7,16.8 32,16.8 32.285,17.085 32.317,17.085 32.5,17.085 36.148,17.085 36.493,17.43 36.805,17.43 36.825,17.45 37.322,17.45 J1.7
850-S2: J1.23 U1.64 | length 6.8
  SIG_TOP w0.2: U1.64 31.011,25.568 31.905,25.568 32.357,26.02 36.2,26.02 36.67,25.55 37.322,25.55 J1.23
850-S3: J1.21 U1.62 | length 7
  SIG_TOP w0.2: U1.62 31.011,24.568 32.005,24.568 32.657,25.22 35.9,25.22 36.62,24.5 J1.21
850-S4: J1.19 U1.60 | length 7.2
  SIG_TOP w0.2: U1.60 32.068,23.528 33,24.46 35.585,24.46 36.545,23.5 J1.19
+5V: C25.1 C26.1 C27.2 D1.2 FB2.2 J1.1 U2.4 U2.5 U5.3 | length 82.6
  SIG_TOP w0.4: D1.2 28.2,4.943 28.506,4.637 29.769,4.637 30.606,3.8 31.794,3.8 32.9,4.906 32.9,5.38 34.137,6.617 34.282,6.617 34.565,6.9 v1(34.8,6.9) ; 36.8,13.6 36.8,13.8 37.47,14.47 38.079,14.47 38.809,15.2 v1(38.9,15.2)
  SIG_TOP w0.6: FB2.2 8.78,37.3 8.965,37.485 8.965,38.339 10.236,39.61 C25.1 12.546,39.8 13.21,39.136 C26.1 25.246,39.136 26.11,40 34.5,40 ; v1(34.5,38.9) 34.5,40 ; v1(34.8,6.9) 36.8,8.9 36.8,13.6 ; C27.2 38.636,40.236 38.45,40.05 37.825,40.05 37.775,40 34.5,40
  SIG_BOT w0.2: U2.5 33.35,6.775 34.675,6.775 v1(34.8,6.9)
  SIG_BOT w0.6: v1(34.5,38.9) 34.6,38.9 38.9,34.6 v1(38.9,15.2)
+5V_FTDI: D5.1 U6.2 | length 5.3
  SIG_BOT w0.6: U6.2 3.975,3.915 3.975,5.622 5.05,6.697 D5.1
+5VUSB: C24.1 D5.3 FB2.1 J3.A4-B9 J3.B4-A9 | length 31.6
  SIG_TOP w0.4: 8.388,24.538 8.709,24.859 8.709,26.377 9.03,26.698 9.03,27.678 8.72,27.988 8.72,29.006 8.388,29.338
  SIG_TOP w0.6: v1(4.1,13.8) 5.246,14.946 5.246,20.01 6.371,21.368 6.566,21.564 8.046,21.564 8.69,22.207 8.69,24.237 8.514,24.412 8.388,24.538 J3.B4-A9 ; J3.A4-B9 8.238,29.338 ; 8.388,29.338 8.238,29.338 ; FB2.1 10.318,37.217 10.318,34.843 8.69,33.215 8.69,29.639 8.408,29.358 8.258,29.358 8.238,29.338
  SIG_BOT w0.6: D5.3@4.101,11.603 v1(4.1,13.8)
-5V: C21.1 J1.4 U2.2 U3.1 U4.4 U4.5 | length 10.6
  SIG_TOP w0.2: v1(34,15.711) 34.29,15.711 34.579,16 J1.4
  SIG_BOT w0.6: C21.1 30.574,10.574 30.574,11.974 32.858,14.258 32.858,14.569 v1(34,15.711)
-10V: C22.1 U3.2 U4.1 | length 0.1
  SIG_BOT w0.6: U4.1@15.75,5.675 U4.1 ; U3.2@23,6.625 U3.2
-15V: C23.1 J1.2 U4.2 | length 34
  SIG_TOP w0.25: 36.647,15.013 36.651,15.009 37.363,15.009 J1.2
  SIG_TOP w0.4: 32.956,13.156 33.912,12.2 35.539,12.2 35.774,12.434 35.774,14.139 36.647,15.013
  SIG_TOP w0.6: v1(15.546,10.153) 15.55,10.149 15.55,7.95 19.4,4.1 23,4.1 24,5.1 24,8.63 28.527,13.156 32.956,13.156
CBS0: R5.1 U6.6 | length 45
  SIG_TOP w0.2: U6.6 6.4,15.85 7.568,14.682 7.568,3.173 8.545,2.196 22.74,2.196 24.529,3.985 24.641,3.985 26.43,5.774 26.43,5.869 30.061,9.5 34.61,9.5 34.96,9.15 R5.1
GND: B1.3 B1.4 C1.1 C2.1 C3.2 C4.1 C5.2 C6.1 C7.1 C8.1 C9.1 C10.1 C11.1 C12.1 C13.1 C14.1 C15.1 C16.1 C17.1 C21.2 C22.2 C23.2 C24.2 C25.2 C26.2 C27.1 C28.1 J1.5 J1.S1 J1.S2 J2.4 J2.6 J3.1 J3.2 J3.3 J3.4 J3.A1-B12 J3.B1-A12 R1.2 R3.1 R4.1 R6.1 U1.10 U1.19 U1.26 U1.49 U1.74 U1.99 U2.1 U3.4 U3.5 U5.1 U6.1 | length 116.2
  SIG_TOP w0.2: J3.B1-A12@7.439,23.738 J3.B1-A12@7.639,23.938 ; J3.A1-B12@7.439,30.138 J3.A1-B12@7.501,30.2 ; J3.A1-B12 J3.A1-B12@7.835,29.938 ; C6.1 13.505,22.159 13.505,22.028 U1.19 ; v1(14.038,27.5) 13.236,27.5 C11.1 13.496,26.568 15.489,26.568 U1.10 ; 16.6,17.4 17.21,17.4 17.25,17.36 U1.26 ; 17.7,34 17.75,33.95 U1.99 ; 28.71,16.09 28.71,17.267 U1.49 ; U1.74 31.568,30.528 31.613,30.484 33.205,30.484 v1(33.821,29.868) 33.817,29.864 C9.1 ; C14.1 v1(36.1,27.8) ; J1.5 37.422,16.45 39.25,16.45 40,15.7 40,13.88 38.92,12.8 v1(38.9,12.8) ; J1.S2 39.102,27.7 v1(40.089,27.7)
  SIG_TOP w0.4: 15.92,16.6 15.92,16.72 16.6,17.4 ; 17.7,34 17.7,34.4 ; R3.1 25.7,6.34 27.434,8.074 27.434,8.634 v1(27.6,8.8) ; C8.1@28.349,15.185 28.349,15.411 28.71,15.772 28.71,16.09 ; R4.1 32.675,12 32.925,11.75 32.925,11.01 33.4,10.535 v1(33.4,10.489) ; v1(38.9,12.8) 38.93,12.83 J1.S1 ; v1(40.2,1.2) R6.1
  SIG_TOP w0.6: J2.4 5.116,38.366 6.32,38.366 7.564,39.61 C25.2 ; J3.2 7.254,22.618 7.439,22.803 J3.B1-A12@7.439,23.738 ; C24.2 7.13,35.13 7.13,31.328 J3.1 7.254,31.258 7.439,31.073 7.439,30.138 J3.A1-B12 ; C17.1 10.658,19.758 10.658,22.722 v1(10.7,22.764) ; C26.2 v1(13.419,36.446) ; v1(15.164,15) 15.164,15.19 15.584,15.61 15.584,16.264 15.92,16.6 ; 17.7,34.4 17.7,34.649 18.051,35 18.416,35 18.436,35.02 v1(18.436,35.4) C10.1 18.911,35.475 R1.2 ; B1.3 22.834,11.634 23.419,12.219 25.245,12.219 25.298,12.272 25.839,12.272 v1(25.9,12.211) ; v1(27.965,14.801) C8.1@28.349,15.185 ; U5.1 v1(39.8,35.4) ; C27.1 40.31,37.564 39.89,37.144 39.89,35.49 v1(39.8,35.4) ; C28.1 40.636,34.41 39.8,35.246 v1(39.8,35.4)
  SIG_BOT w0.4: J3.4 3.28,22.618 4.464,23.802 C2.1 ; J3.1 J3.1 7.339,30.981 7.339,28.503 C1.1 ; C22.2 26,9.425 26.475,8.95 27.45,8.95 v1(27.6,8.8)
  SIG_BOT w0.6: v1(10.7,22.764) C5.2 ; C3.2 15.99,32.036 18.308,34.354 18.308,35.272 v1(18.436,35.4) ; v1(18.744,10.139) 18.75,10.145 C23.2 ; v1(21.036,21.6) 21.268,21.368 21.268,19.532 C16.1 ; v1(25.9,12.211) 25.95,12.161 25.95,10.2 C22.2 ; U2.1 29.151,5.7 28.8,5.349 28.8,1.451 29.151,1.1 34.014,1.1 36.5,3.586 36.5,8.5 34.7,10.3 C21.2@33.4,10.3 ; C21.2 C21.2@33.4,10.3 ; v1(33.4,10.489) C21.2@33.4,10.3
  other v1: 23.5,14.8 24.3,21.264
LED_OUT: D4.2 U1.86 | length 57.2
  SIG_TOP w0.2: U1.86 24.29,32.79 24.29,33.562 24.728,34 25.1,34
  SIG_TOP w0.4: 25.1,34 25.253,34 26.053,34.8 v1(26.2,34.8) ; D4.2 37.4,2.657 38.486,3.743 v1(38.486,3.772)
  SIG_BOT w0.4: v1(26.2,34.8) 31.389,39.989 36.751,39.989 41.178,35.562 41.178,5.878 39.238,3.938 38.652,3.938 v1(38.486,3.772)
LSE_IN: C3.1 U1.8 X2.2 | length 8.4
  SIG_TOP w0.2: U1.8 17.999,27.528 18.417,27.947 19.047,27.947 v1(19.2,28.1)
  SIG_BOT w0.2: C3.1 16.42,28.744 16.893,28.744 17.01,28.627 17.01,28.008 17.185,27.833 X2.2 17.417,27.817 18.2,27.817 18.484,28.1 v1(19.2,28.1)
LSE_OUT: C5.1 U1.9 X2.1 | length 8
  SIG_TOP w0.2: U1.9 18.055,27.028 18.23,26.853 18.847,26.853 v1(19,26.7)
  SIG_BOT w0.2: C5.1 15.857,25.593 16.883,25.593 17,25.71 17,26.592 17.192,26.783 17.242,26.733 18.967,26.733 v1(19,26.7)
MUX1_S0: J1.16 U1.58 | length 6.6
  SIG_TOP w0.2: U1.58 33.372,22.528 33.869,22.031 37.341,22.031 J1.16
MUX1_S1: J1.15 U1.57 | length 6.6
  SIG_TOP w0.2: U1.57 33.272,22.028 33.66,21.64 36.296,21.64 36.436,21.5 J1.15
MUX1_S2: J1.14 U1.56 | length 6.6
  SIG_TOP w0.2: U1.56 33.234,21.528 33.503,21.26 36.139,21.26 36.399,21 J1.14
MUX2_S0: J1.13 U1.55 | length 6.6
  SIG_TOP w0.2: U1.55 33.197,21.028 33.345,20.88 35.981,20.88 36.291,20.57 36.805,20.57 36.825,20.55 37.322,20.55 J1.13
MUX2_S1: J1.12 U1.92 | length 23.5
  SIG_TOP w0.2: U1.92 21.25,29.95 26.1,25.1 v1(26.2,25.1) ; v1(33.7,19.9) 34.3,20.5 35.8,20.5 36.3,20 J1.12
  SIG_BOT w0.2: v1(26.2,25.1) 29.795,21.613 cw(c29.2,21) 29.826,21.581 31.183,20.117 31.3,20 31.383,20 33.6,20 v1(33.7,19.9)
MUX2_S2: J1.11 U1.93 | length 26.1
  SIG_TOP w0.2: U1.93 20.75,28.233 20.867,28.116 23.673,25.827 23.731,25.769 26.303,23.197 v1(26.479,22.28) ; v1(35.4,19.646) 35.496,19.55 37.322,19.55 J1.11
  SIG_BOT w0.2: v1(26.479,22.28) 26.479,21.321 28.789,19.011 30.359,19.011 34.765,19.011 v1(35.4,19.646)
MUX_EN: J1.10 U1.52 | length 7
  SIG_TOP w0.2: U1.52 32.272,19.528 33.3,18.5 35.8,18.5 36.3,19 J1.10
NetC1_2: C1.2 U1.12 X1.1 | length 26.2
  SIG_TOP w0.2: v1(10.3,30.3) 10.171,30.3 9.2,29.329 9.2,28.187 9.51,27.877 9.51,26.499 9.2,26.189 9.2,24.91 9.674,24.436 13.926,24.436 14.12,24.63 14.12,25.08 14.569,25.528 U1.12
  SIG_BOT w0.2: C1.2 4.464,30.561 6.014,32.112 8.488,32.112 v1(10.3,30.3) 11.15,30.3 11.35,30.1 X1.1@11.35,29.499
  SIG_BOT w0.6: X1.1@11.35,29.499 12.1,28.749 X1.1
NetC2_2: C2.2 U1.13 X1.2 | length 26.3
  SIG_TOP w0.2: v1(9.071,20.4) 9.073,20.402 9.073,21.771 9.4,22.097 9.4,23.49 9.674,23.764 14.383,23.764 14.5,23.881 14.5,24.772 14.716,24.989 15.489,24.989 U1.13
  SIG_BOT w0.2: C2.2@6.616,25.029 6.129,25.029 5.556,24.456 5.556,20.944 6.971,19.529 8.2,19.529 v1(9.071,20.4) 9.181,20.51 9.871,20.51 9.971,20.61 11.15,20.61 11.35,20.81 X1.2@11.35,21.2
  SIG_BOT w0.4: C2.2@6.616,25.029 7.136,25.549 C2.2
  SIG_BOT w0.6: X1.2@11.35,21.2 11.55,21 12.1,20.45 X1.2
NetC13_2: C13.2 U1.48 | length 4
  SIG_TOP w0.2: C13.2 26.172,14.99 C13.2@26.6,15.418 ; 27.815,16.1 28.21,16.495 28.21,17.267 U1.48
  SIG_TOP w0.4: C13.2@26.6,15.418 26.6,15.983 26.717,16.1 27.815,16.1
NetC14_2: C14.2 U1.73 | length 3.8
  SIG_TOP w0.2: U1.73 31.011,29.989 31.911,29.989 32.4,29.5
  SIG_TOP w0.4: 32.4,29.5 32.4,28.783 32.673,28.51 32.844,28.51 33.364,27.99 C14.2
NetC15_2: C15.2 C16.2 FB1.2 U1.21 | length 8.1
  SIG_TOP w0.2: U1.21 17.813,21.028 18.364,21.579 v1(18.364,21.6)
  SIG_BOT w0.2: v1(18.364,21.6) 18.364,22.814 19.4,23.85 FB1.2
  SIG_BOT w0.6: C16.2 18.332,19.332 18.332,21.568 v1(18.364,21.6)
NetC17_2: C17.2 U1.20 | length 3.2
  SIG_TOP w0.2: 14.2,21.4 14.328,21.528 U1.20
  SIG_TOP w0.6: C17.2 13.656,19.644 13.656,20.849 14.007,21.2 14.1,21.2
NetC18_1: C18.1 U2.6
NetC18_2: C18.2 U2.3
NetC19_1: C19.1 U3.6
NetC19_2: C19.2 U3.3
NetC20_1: C20.1 U4.6
NetC20_2: C20.2 U4.3
NetD1_1: D1.1 R3.2 | length 3.1
  SIG_TOP w0.6: R3.2 25.475,3.26 25.85,3.26 26.324,3.734 28.177,3.734 D1.1
NetD2_1: D2.1 R4.2 | length 4.5
  SIG_TOP w0.6: D2.1 31.2,8.045 31.925,8.77 R4.2
NetD3_1: D3.1 R5.2 | length 5.9
  SIG_TOP w0.6: D3.1 34.4,4.943 35.168,5.711 35.292,5.711 38.04,8.458 38.04,8.875 R5.2
NetD4_1: D4.1 R6.2 | length 3.6
  SIG_TOP w0.6: D4.1 37.4,4.943 38.607,6.15 40.05,6.15 R6.2
NetR1_1: R1.1 U1.94 | length 5.7
  SIG_TOP w0.2: U1.94 20.25,33.95 20.4,34.1
  SIG_TOP w0.4: 20.4,34.1 21.9,34.1
  SIG_TOP w0.6: 21.9,34.1 23.142,35.342 24.008,35.342 R1.1
nRST: J2.9 U1.90 | length 22.1
  SIG_TOP w0.2: v1(22.188,30.981) 22.219,31.012 22.219,32.719 U1.90
  SIG_BOT w0.2: J2.9 3.75,34.452 5.202,33 11.596,33 13.996,30.6 17.3,30.6 17.769,31.069 22.099,31.069 v1(22.188,30.981)
RST_BTN: B1.1 B1.2 C4.2 R2.1 U1.14 | length 34.8
  SIG_TOP w0.2: U1.14 17.572,24.528
  SIG_TOP w0.4: 17.572,24.528 20.128,24.528 20.925,25.325 v1(20.925,25.453)
  SIG_TOP w0.6: R2.1 17.431,8.96 17.581,8.81 17.581,8.119 19.558,6.142 20.659,6.142 B1.1@20.684,6.117 ; B1.1 B1.1@20.684,6.117 ; v1(20.7,14.9) 20.692,14.892 20.692,9.975 B1.2 B1.1@20.684,6.117
  SIG_BOT w0.6: v1(20.7,14.9) 20.729,14.9 22.655,16.826 22.655,22.49 22.022,23.123 21.967,23.123 21.054,24.037 21.054,25.325 v1(20.925,25.453) ; 22.022,23.336 22.185,23.336 22.49,23.641 24.005,23.641 C4.2
SWCLK: J2.3 U1.76 | length 37.3
  SIG_TOP w0.2: v1(27.254,31.254) 27.346,31.162 27.346,30.454 27.892,29.908 29.434,29.908 29.551,30.026 29.551,31.549 29.25,31.85 U1.76
  SIG_BOT w0.2: J2.3 3.506,38.27 3.14,38.636 3.053,38.636 2.846,38.843 2.846,40.237 3.433,40.824 17.576,40.824 22.753,35.647 v1(27.254,31.254)
SWDIO: J2.1 U1.72 | length 33.2
  SIG_TOP w0.2: v1(26.8,29.4) 27.194,29.533 27.225,29.543 27.305,29.543 27.666,29.543 27.68,29.528 U1.72
  SIG_BOT w0.2: J2.1 3.729,39.99 3.729,39.994 3.722,40.15 3.722,40.154 3.722,40.158 3.722,40.241 3.781,40.3 3.839,40.359 4.636,40.359 cw(c5.02,39.54) 5.404,40.359 16.941,40.359 25.975,31.325 25.975,30.225 v1(26.8,29.4)
SWO: J2.5
TDI: J2.7 U1.77 | length 38.6
  SIG_TOP w0.2: v1(28.604,31.004) 28.75,31.15 U1.77
  SIG_BOT w0.2: J2.7 3.742,35.73 2,37.472 2,40.5 2.9,41.4 5.841,41.4 18.2,41.4 18.317,41.283 27.854,31.861 cw(c27.254,31.254) 27.898,31.815 v1(28.604,31.004)
TIA_OUT_A: J1.8 U1.30 | length 20.5
  SIG_TOP w0.2: U1.30 19.25,18.55 v1(19.9,19.2) ; v1(31.278,17.755) 31.437,17.755 31.692,17.5 36.025,17.5 36.455,17.93 36.805,17.93 36.825,17.95 37.322,17.95 J1.8
  GND_TOP w0.2: v1(19.9,19.2) 21.3,17.8 31.232,17.8 v1(31.278,17.755)
TIA_OUT_B: J1.18 U1.15 | length 25.8
  SIG_TOP w0.2: U1.15 17.972,24.028 18.83,23.17 18.889,23.111 21.015,23.111 21.018,23.114 21.082,23.178 21.568,23.793 21.57,23.795 21.57,24.202 v1(22.6,25.232) ; v1(34.5,23.4) 34.705,23.195 35.294,23.195 35.49,23 J1.18
  SIG_BOT w0.2: v1(22.6,25.232) 23.195,25.827 23.195,26.299 23.585,26.689 26.311,26.689 29.629,23.371 34.471,23.371 v1(34.5,23.4)
TIA_RST_A: J1.9 U1.66 | length 18.1
  SIG_TOP w0.2: U1.66 30.932,26.489 30.16,26.489 28.321,24.65 28.249,24.479 28.249,20.451 28.308,20.392 30.098,18.602 30.264,18.602 31.271,18.609 cw(c31.287,16.463) 31.275,18.609 32.176,18.609 32.904,17.88 35.868,17.88 36.418,18.43 36.805,18.43 36.825,18.45 37.322,18.45 J1.9
TIA_RST_B: J1.17 U1.59 | length 6.7
  SIG_TOP w0.2: U1.59 33.472,23.028 34.089,22.411 35.074,22.411 35.163,22.5 J1.17
UART_CTS: U1.53 U6.3 | length 41.8
  SIG_TOP w0.2: v1(29.2,21) 29.2,20.8 29.972,20.028 U1.53
  SIG_BOT w0.2: U6.3 6.4,4.45 12.1,10.15 12.1,13.383 14.817,16.1 18.8,16.1 19.6,15.3 19.6,14.4 20.2,13.8 21.5,13.8 22,14.3 22,15 25.49,18.49 25.49,22.69 26.1,23.3 27.2,23.3 27.317,23.183 v1(29.2,21)
UART_RTS: U1.34 U6.4 | length 20.9
  SIG_TOP w0.2: U6.4 8.94,4.45 14.1,9.61 14.1,10.6 14.7,11.2 18,11.2 19,12.2 19,14.942 19.059,15 ; 19.059,15 19.065,15.007 20.611,16.29 21.006,16.29 21.17,16.454 21.17,16.75 21.21,16.795 21.21,17.267 U1.34
UART_RX: U1.22 U6.7 | length 20
  SIG_TOP w0.2: v1(11,13.4) 12.02,14.42 12.558,14.42 14.328,16.19 14.627,16.19 16.925,18.488 16.925,19.941 16.378,20.489 15.568,20.489 U1.22
  SIG_BOT w0.2: U6.7 3.86,15.74 6.2,13.4 v1(11,13.4)
UART_TX: U1.23 U6.8 | length 22.9
  SIG_TOP w0.2: v1(11,14.8) 12.401,14.8 14.201,16.6 14.5,16.6 16.545,18.645 16.545,19.784 16.34,19.989 15.568,19.989 U1.23
  SIG_BOT w0.2: U6.8 1.32,16.843 1.782,17.305 2.037,17.305 2.836,18.104 4.596,18.104 5.13,17.57 5.13,15.27 5.8,14.6 9.783,14.6 10.1,14.917 10.883,14.917 v1(11,14.8)
USB_OTG_D_N: J3.A7 J3.B7 U1.70 | length 45.6
  SIG_TOP w0.254: v1(27.8,26.5) 27.904,26.5 29.92,28.516 30.959,28.516 U1.70
  SIG_TOP w0.261: v1(2.99,26.2) 2.937,26.2 1.9,27.237 1.9,28.3 2.5,28.9 4.1,28.9 5.312,27.688 J3.B7 ; J3.A7 7.654,26.707 8.318,26.707 8.52,26.909 8.52,27.466 8.318,27.668 7.66,27.668 J3.B7@7.635,27.694
  GND_TOP w0.254: v1(2.99,26.2) 4.178,27.388 4.178,27.708 5.159,28.688 7.122,28.688 10.6,32.166 22.249,32.166 24.202,30.213 24.202,29.838 26.155,27.885 26.415,27.885 v1(27.8,26.5)
USB_OTG_D_P: J3.A6 J3.B6 U1.71 | length 39.8
  SIG_TOP w0.2: J3.A6 J3.A6@7.685,27.138
  SIG_TOP w0.254: v1(27.834,27.754) 27.886,27.828 27.997,27.938 28.729,27.938 29.819,29.028 U1.71
  SIG_TOP w0.261: v1(2.99,27.517) 4.107,26.399 6.739,26.399 6.931,26.207 7.615,26.207 J3.B6 ; 6.749,26.409 6.749,26.966 6.951,27.168 7.615,27.168 J3.A6
  GND_TOP w0.254: v1(2.99,27.517) 3.722,28.249 3.722,28.532 4.312,29.122 6.852,29.122 10.33,32.6 22.428,32.6 24.754,30.274 24.754,29.9 26.335,28.319 27.132,28.319 27.698,27.754 v1(27.834,27.754)
pads on no net: D5.2 J2.8 J2.10 J3. J3.A5 J3.A8 J3.B5 J3.B8 U1.1 U1.2 U1.3 U1.4 U1.5 U1.7 U1.16 U1.17 U1.18 U1.24 U1.25 U1.28 U1.29 U1.31 U1.32 U1.33 U1.35 U1.36 U1.37 U1.38 U1.39 U1.40 U1.41 U1.42 U1.43 U1.44 U1.45 U1.46 U1.47 U1.51 U1.54 U1.69 U1.78 U1.79 U1.80 U1.81 U1.82 U1.83 U1.84 U1.85 U1.87 U1.88 U1.89 U1.91 U1.95 U1.96 U1.97 U1.98 U6.5

## Polygon pours and split planes (outlines as drawn)
-5V on SIG_BOT "GND_POUR_BOT" (solid, remove dead copper, pour order 22): 19.1,6.344 19.456,6.344 20,5.8 20,0.8 20.5,0.3 28.3,0.3 28.3,5.8 28.8,6.3 30.9,6.3 30.9,6.934 30.834,7 27.2,7 26.8,6.6 26.8,1.5 21.8,1.5 21.7,1.6 21.7,6 21.5,6 19.295,7.994 19,8
-5V on SIG_BOT "GND_POUR_BOT" (solid, remove dead copper, pour order 21): 30.9,7 30.9,6.3 28.8,6.3 28.1,7 28.1,10.4 29.3,11.6 30.9,11.6 30.9,8.8 29.1,8.8 29.1,7
+5V on SIG_BOT "GND_POUR_BOT" (solid, remove dead copper, pour order 20): 32.6,8 32.6,6.3 33.9,6.3 33.9,8
GND on SIG_BOT "GND_POUR_BOT" (solid, remove dead copper, pour order 19): 25.4,11.5 25.4,6.3 26.6,6.3 26.6,11.5
NetC18_1 on SIG_BOT "GND_POUR_BOT" (solid, remove dead copper, pour order 16): 32.6,6.1 32.6,1.8 33.9,1.8 33.9,6.1
NetC19_1 on SIG_BOT "GND_POUR_BOT" (solid, remove dead copper, pour order 15): 25.3,6.1 25.3,1.8 26.6,1.8 26.6,6.1
NetC18_2 on SIG_BOT "GND_POUR_BOT" (solid, remove dead copper, pour order 14): 29.7,7.9 29.7,7.3 30.9,7.3 31.2,7 31.2,4.8 31,4.6 29.3,4.6 29.3,1.7 30.8,1.7 32,2.9 32,7.9
NetC19_2 on SIG_BOT "GND_POUR_BOT" (solid, remove dead copper, pour order 12): 22.4,7.9 22.4,7.3 23.6,7.3 23.9,7 23.9,4.8 23.7,4.6 22,4.6 22,1.7 23.5,1.7 24.7,2.9 24.7,7.9
-5V on SIG_BOT "GND_POUR_BOT" (solid, remove dead copper, pour order 11): 19.3,8 18.1,8 18.1,6.433 18.19,6.344 19.656,6.344 20.8,5.4 23.6,5.4 23.6,6 21.3,6 19.3,8 18.1,8 18.1,6.433 18.19,6.344 19.3,6.344
-10V on SIG_BOT "GND_POUR_BOT" (solid, remove dead copper, pour order 10): 16.4,6 16.4,5.4 12.6,5.4 12.6,12.3 13.3,13 22.3,13 23.6,11.7 23.5,11.6 23.5,8.7 22.2,8.7 22.2,6.97 23.6,6.97 23.6,6.3 21.6,6.3 21.221,6.679 21.221,11.8 14.8,11.8 13.7,10.7 13.7,6
-15V on SIG_BOT "GND_POUR_BOT" (solid, remove dead copper, pour order 9): 16.4,7 16.4,6.3 14.3,6.3 13.9,6.7 13.9,10.6 14.9,11.6 16.3,11.6 16.3,8.7 14.8,8.7 14.8,7.2 15,7
-5V on SIG_BOT "GND_POUR_BOT" (solid, remove dead copper, pour order 8): 18.1,8 18.1,6.3 19.3,6.3 19.3,8
NetC20_1 on SIG_BOT "GND_POUR_BOT" (solid, remove dead copper, pour order 7): 18.1,6.1 18.1,1.8 19.4,1.8 19.4,6.1
NetC20_2 on SIG_BOT "GND_POUR_BOT" (solid, remove dead copper, pour order 4): 15.2,7.9 15.2,7.3 16.4,7.3 16.7,7 16.7,4.8 16.5,4.6 14.8,4.6 14.8,1.7 16.3,1.7 17.5,2.9 17.5,7.9
GND on GND_BOT "GND_POUR_BOT" (solid, remove dead copper, pour order 18): 0.2,41.6 41.6,41.6 41.6,0.4 0.2,0.4
GND on SIG_TOP "GND_POUR_BOT" (solid, remove dead copper, pour order 24): 14.1,21.95 14.1,23.25 10.1,23.25 10.1,21.95
3V3 on SIG_TOP "GND_POUR_BOT" (solid, remove dead copper, pour order 23): 13.7,24.5 13.7,25.966 10.1,25.966 10.1,24.5
GND on GND_TOP "GND_POUR_BOT" (solid, remove dead copper, pour order 29): 0.1,41.8 0.1,0.3 41.8,0.3 41.8,41.6 41.7,41.8

## Silkscreen, mask and mechanical layers (free items; w line width, h text height)
Top Overlay:
  drawing of 13 lines, arcs and shapes, not listed
  text "Reset" at 19.354,3.654 h1
Board:
  the board outline again, w0.2

## Text inside footprints (layer, text, board x,y; h text height)
U1: Top Overlay "*" at 13.839,31.024 h1.27; Mechanical 13 "*" at 13.839,31.024 h1.27